# Altium PCB pale_sieve.PcbDoc (part 1 of 2)
Units mm, origin at the board's own origin, x right, y up, seen from the top; angles counter-clockwise.
Board outline 51 x 51 mm, 6 copper layers (Top, L2, L3, L4, L5, Bottom), stack 1.546 mm thick; 73 components, 40 nets, 184 pads, 29 vias.
Unrouted connection lines stored in the file: 36.
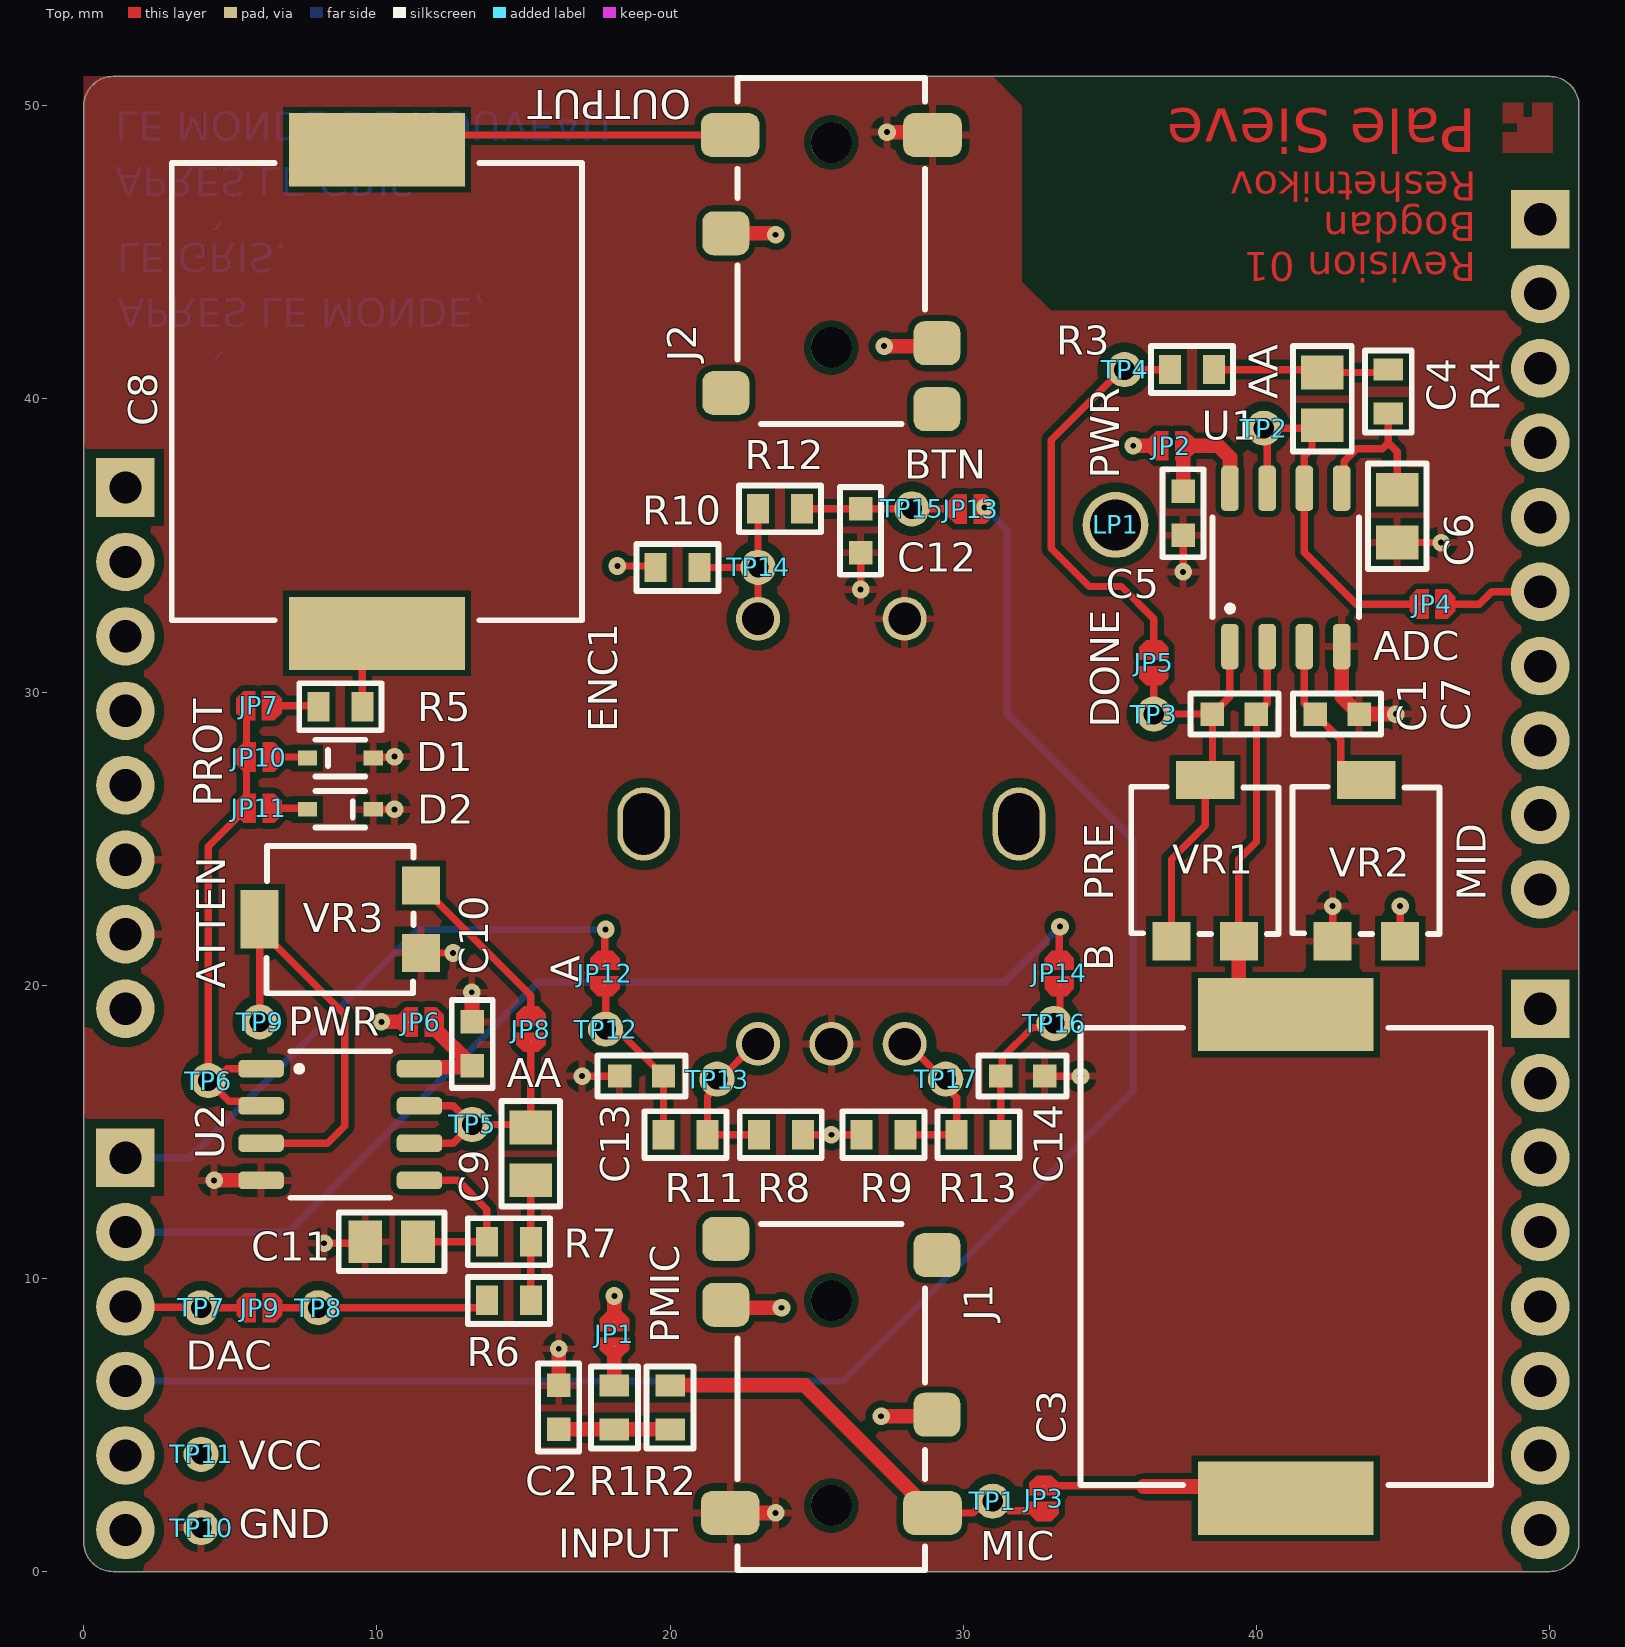
[diagram p0: Top view]
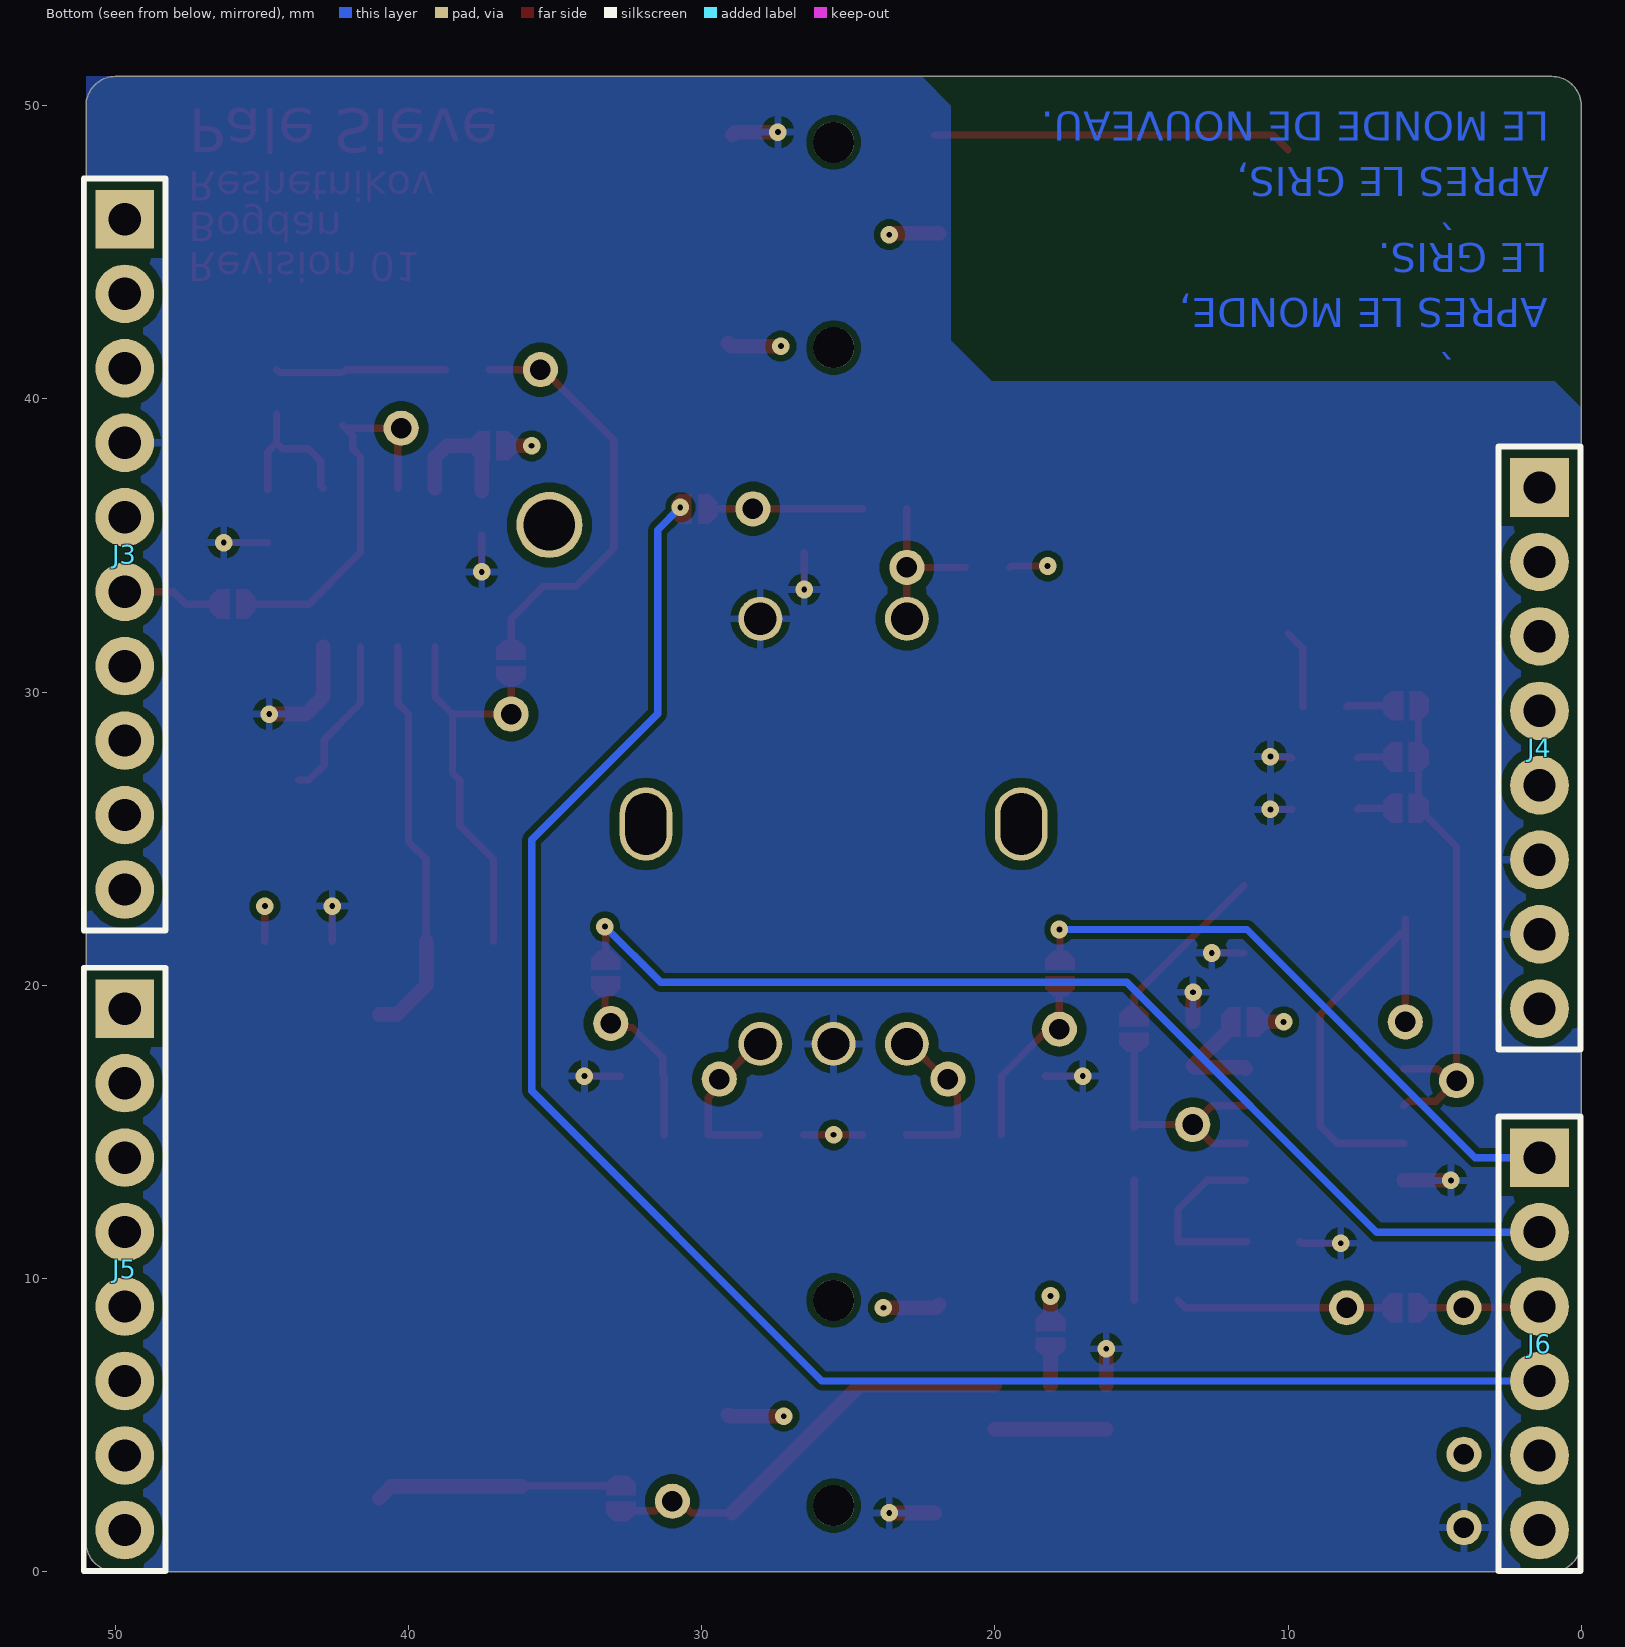
[diagram p1: Bottom view, seen from below]
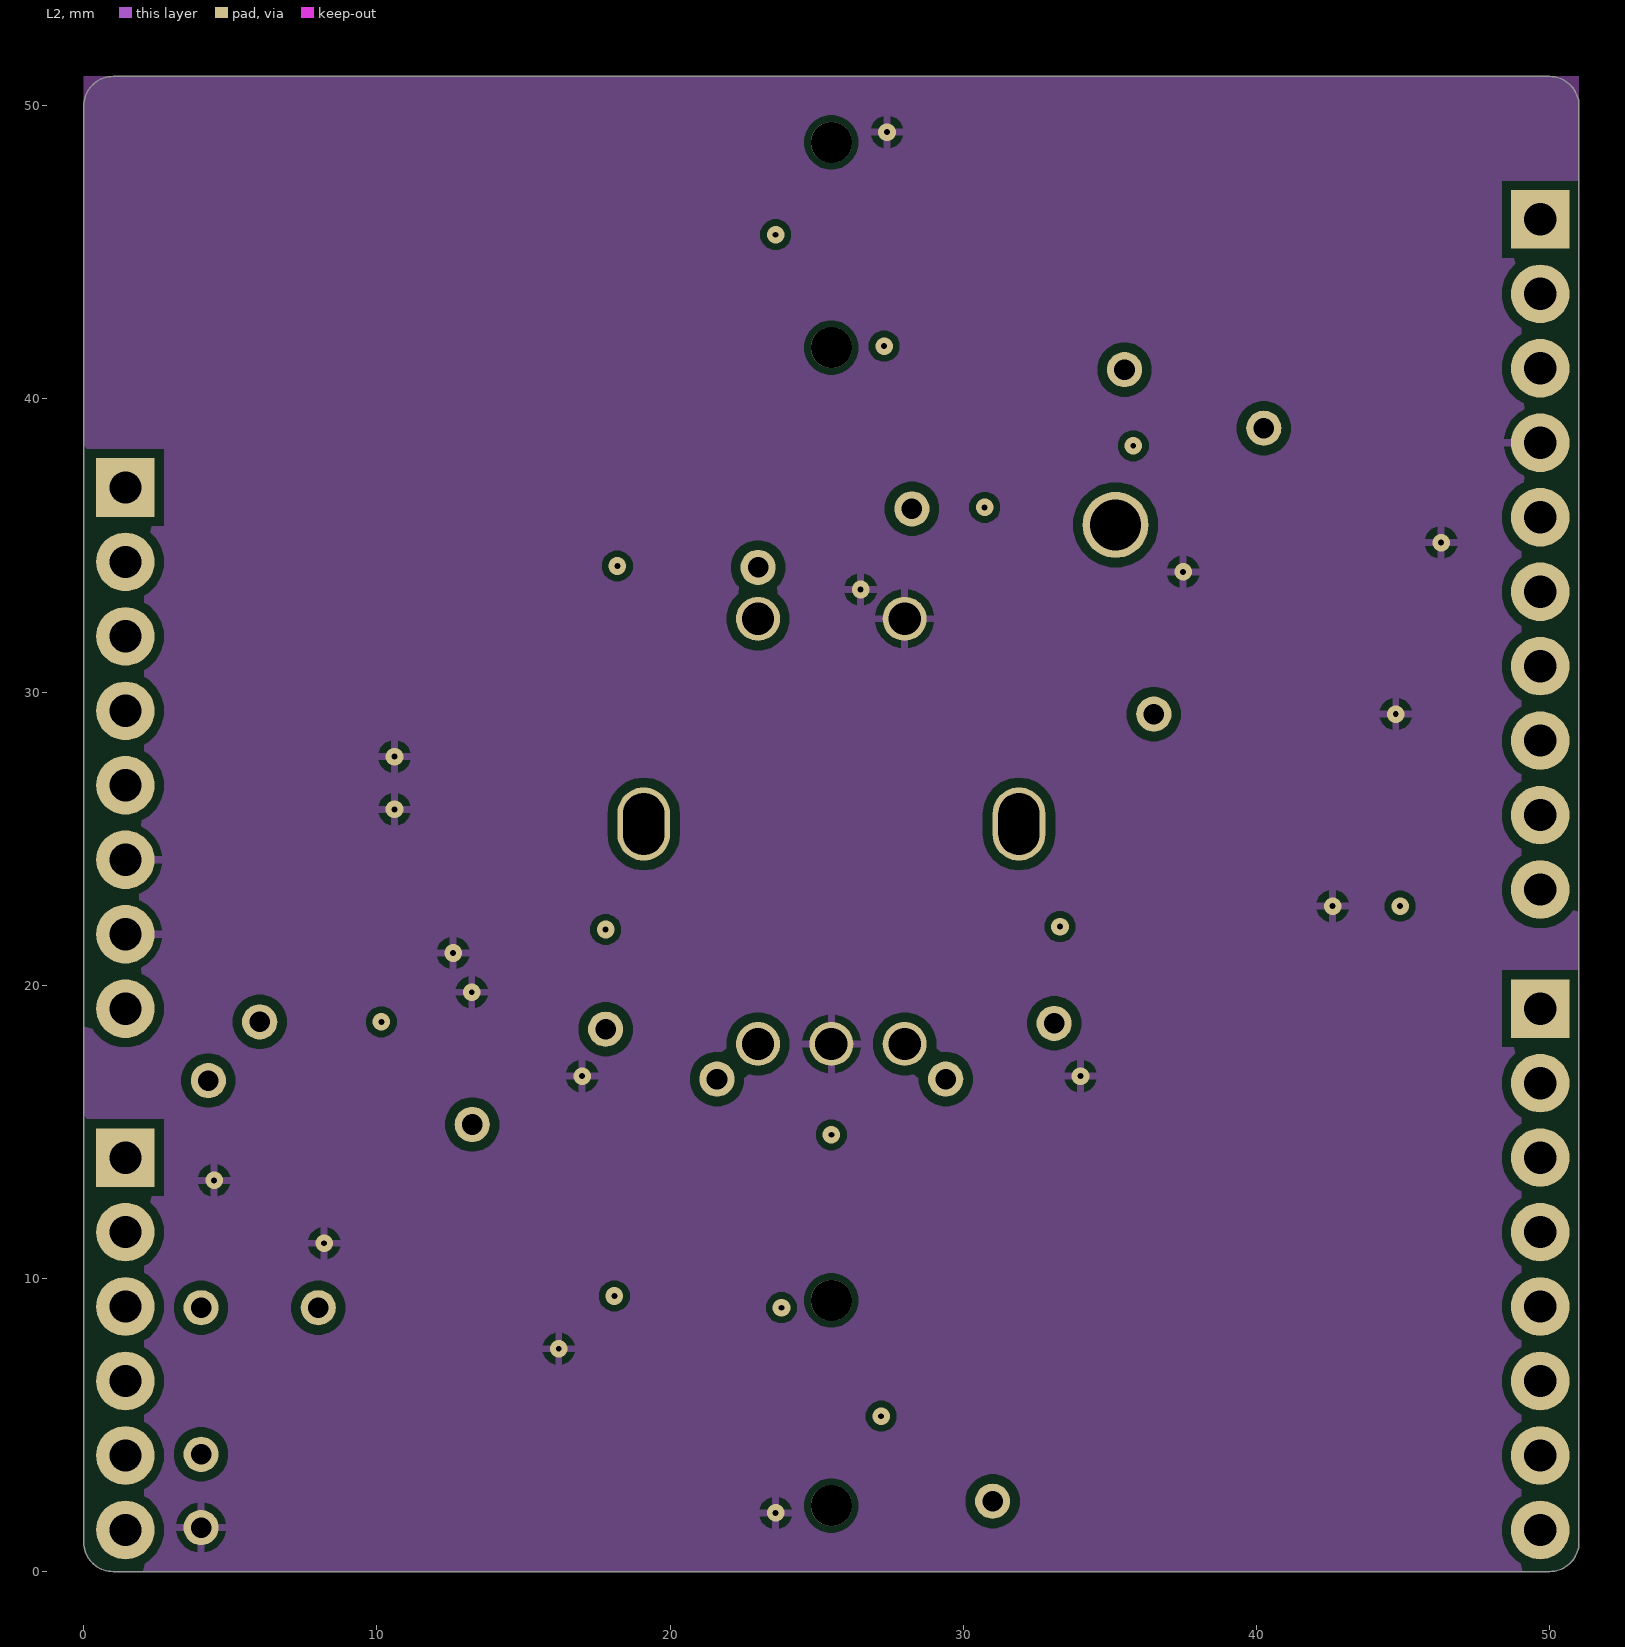
[diagram p2: L2]
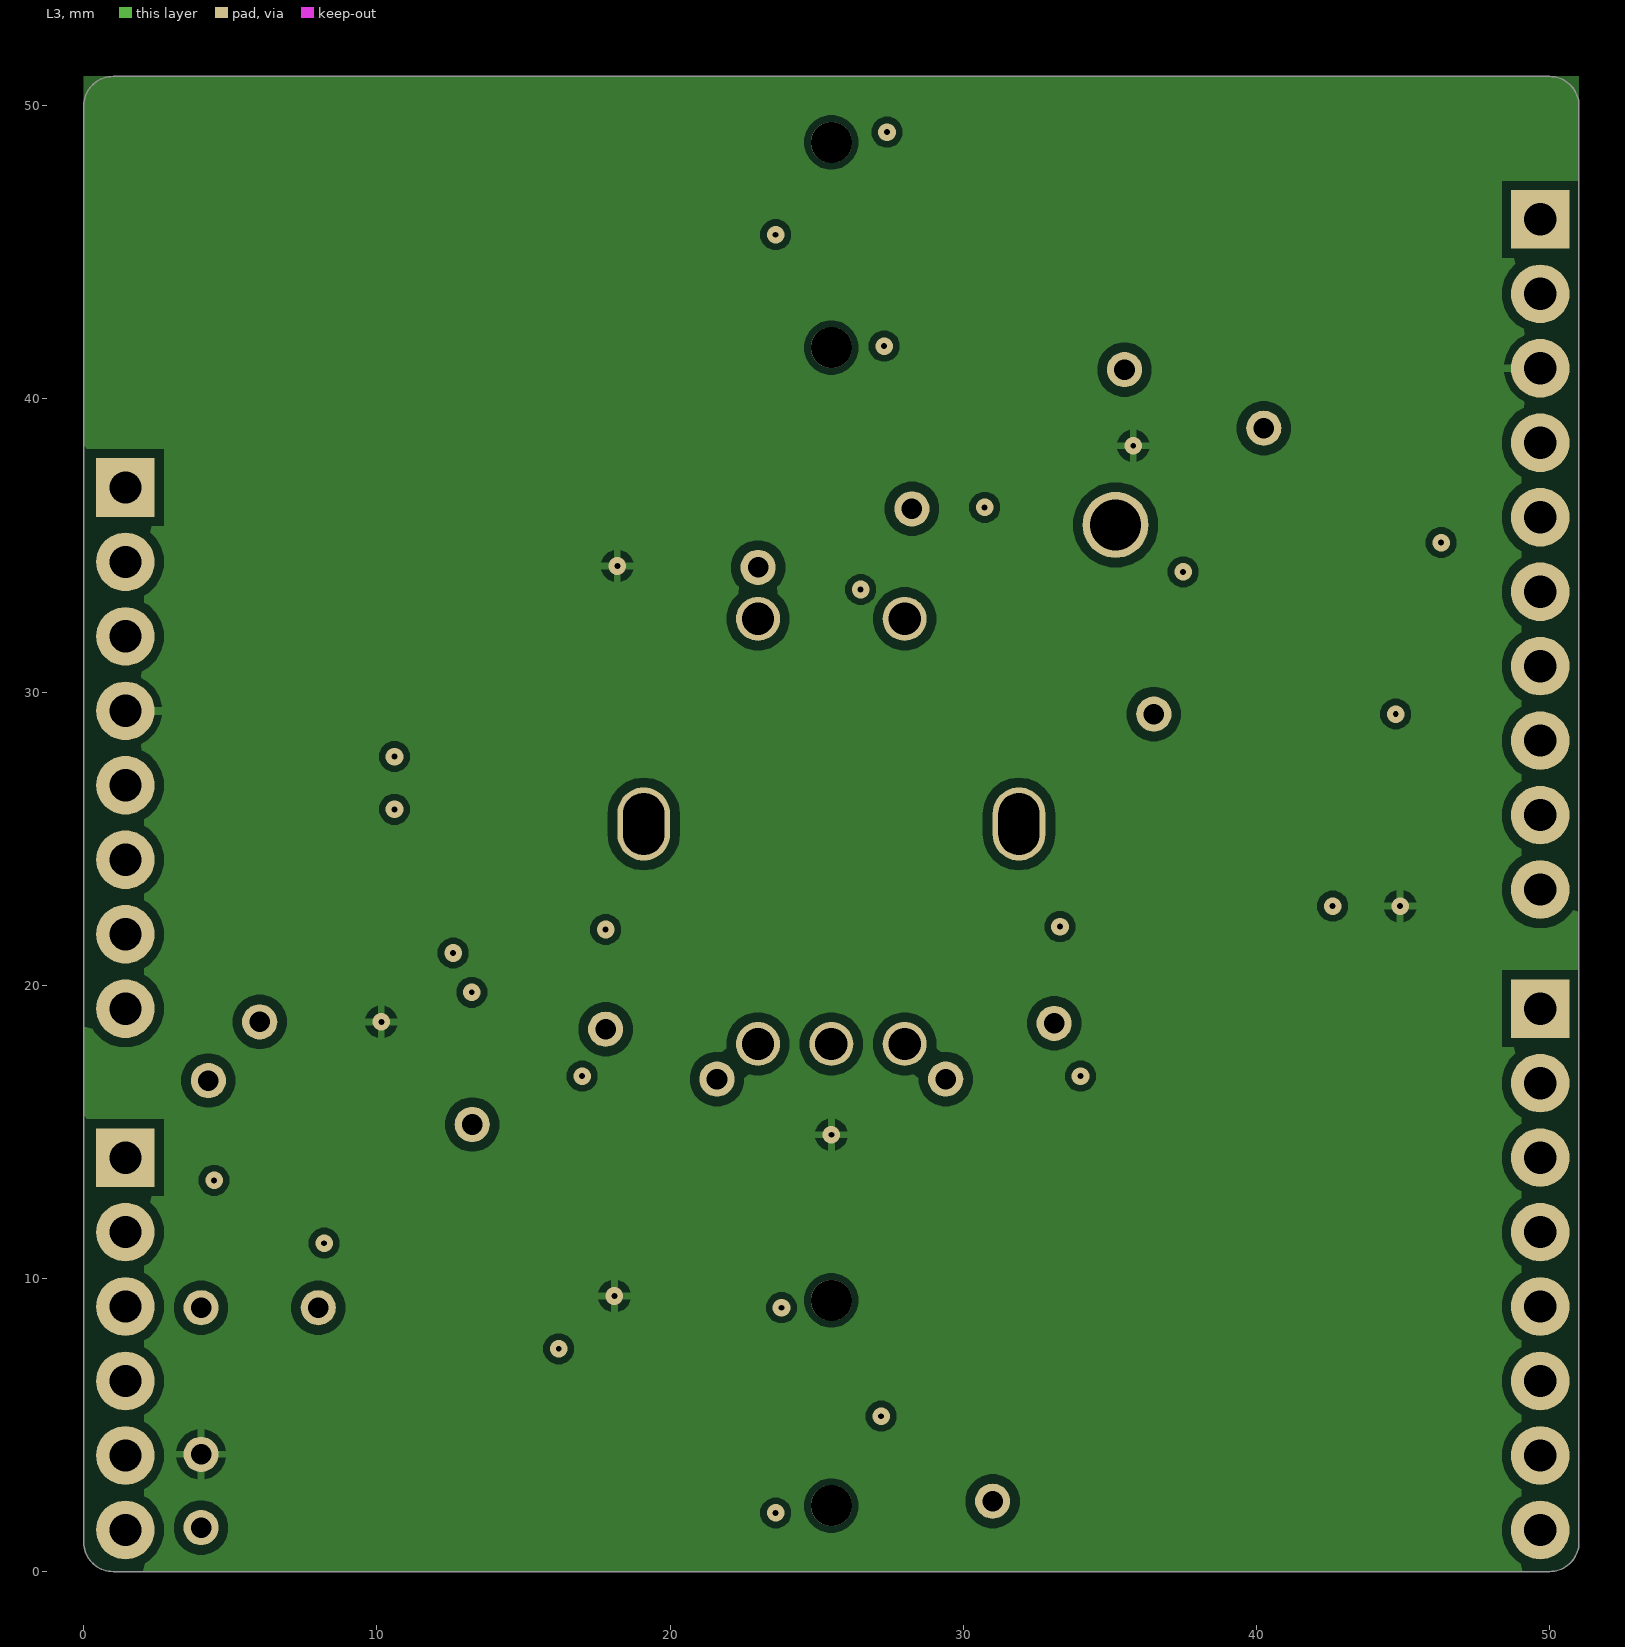
[diagram p3: L3]
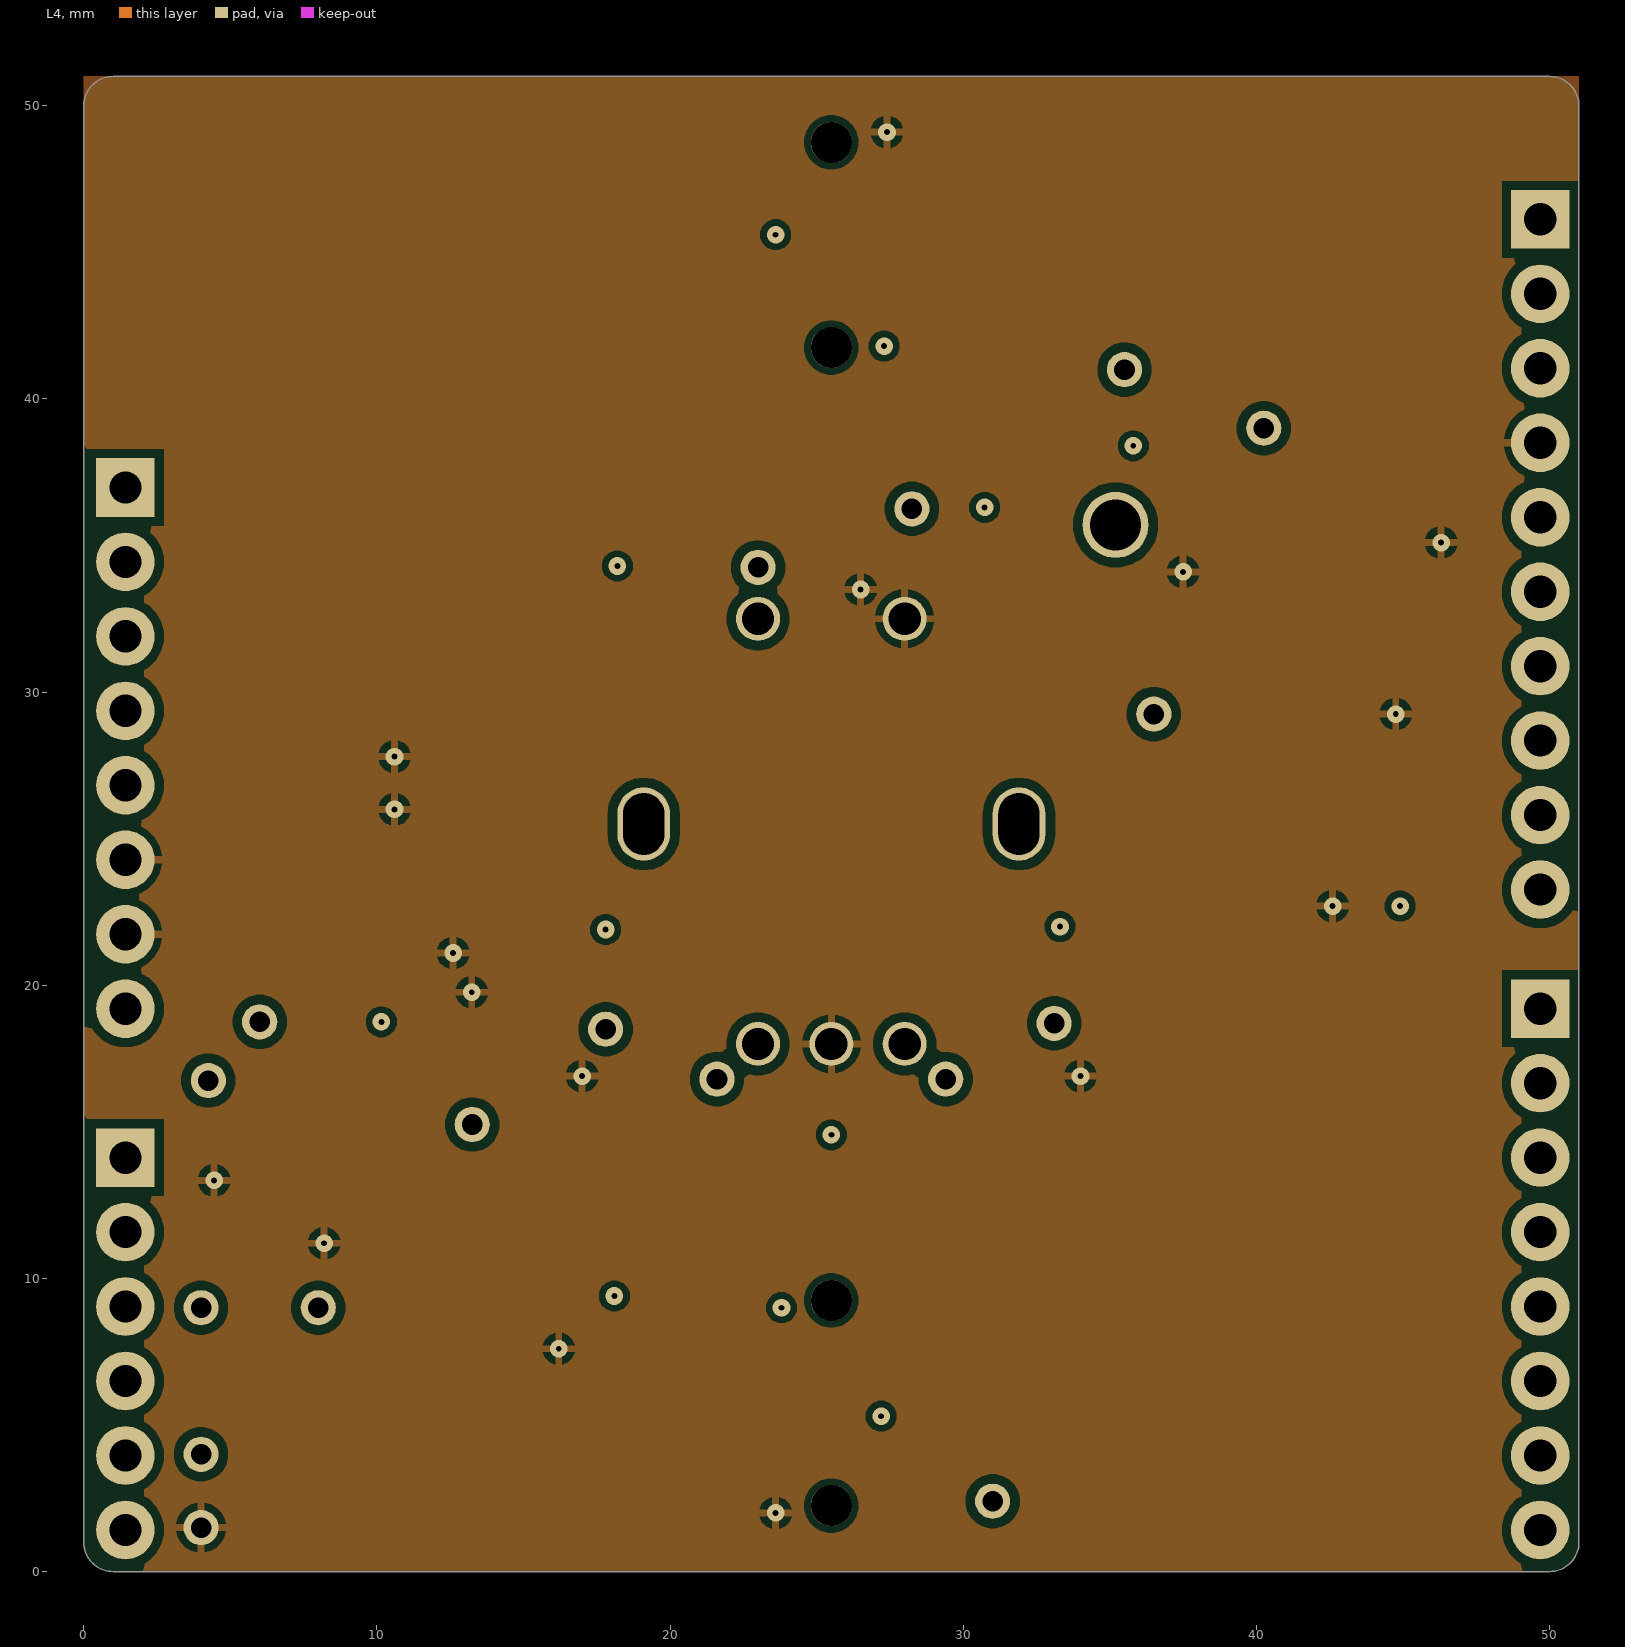
[diagram p4: L4]
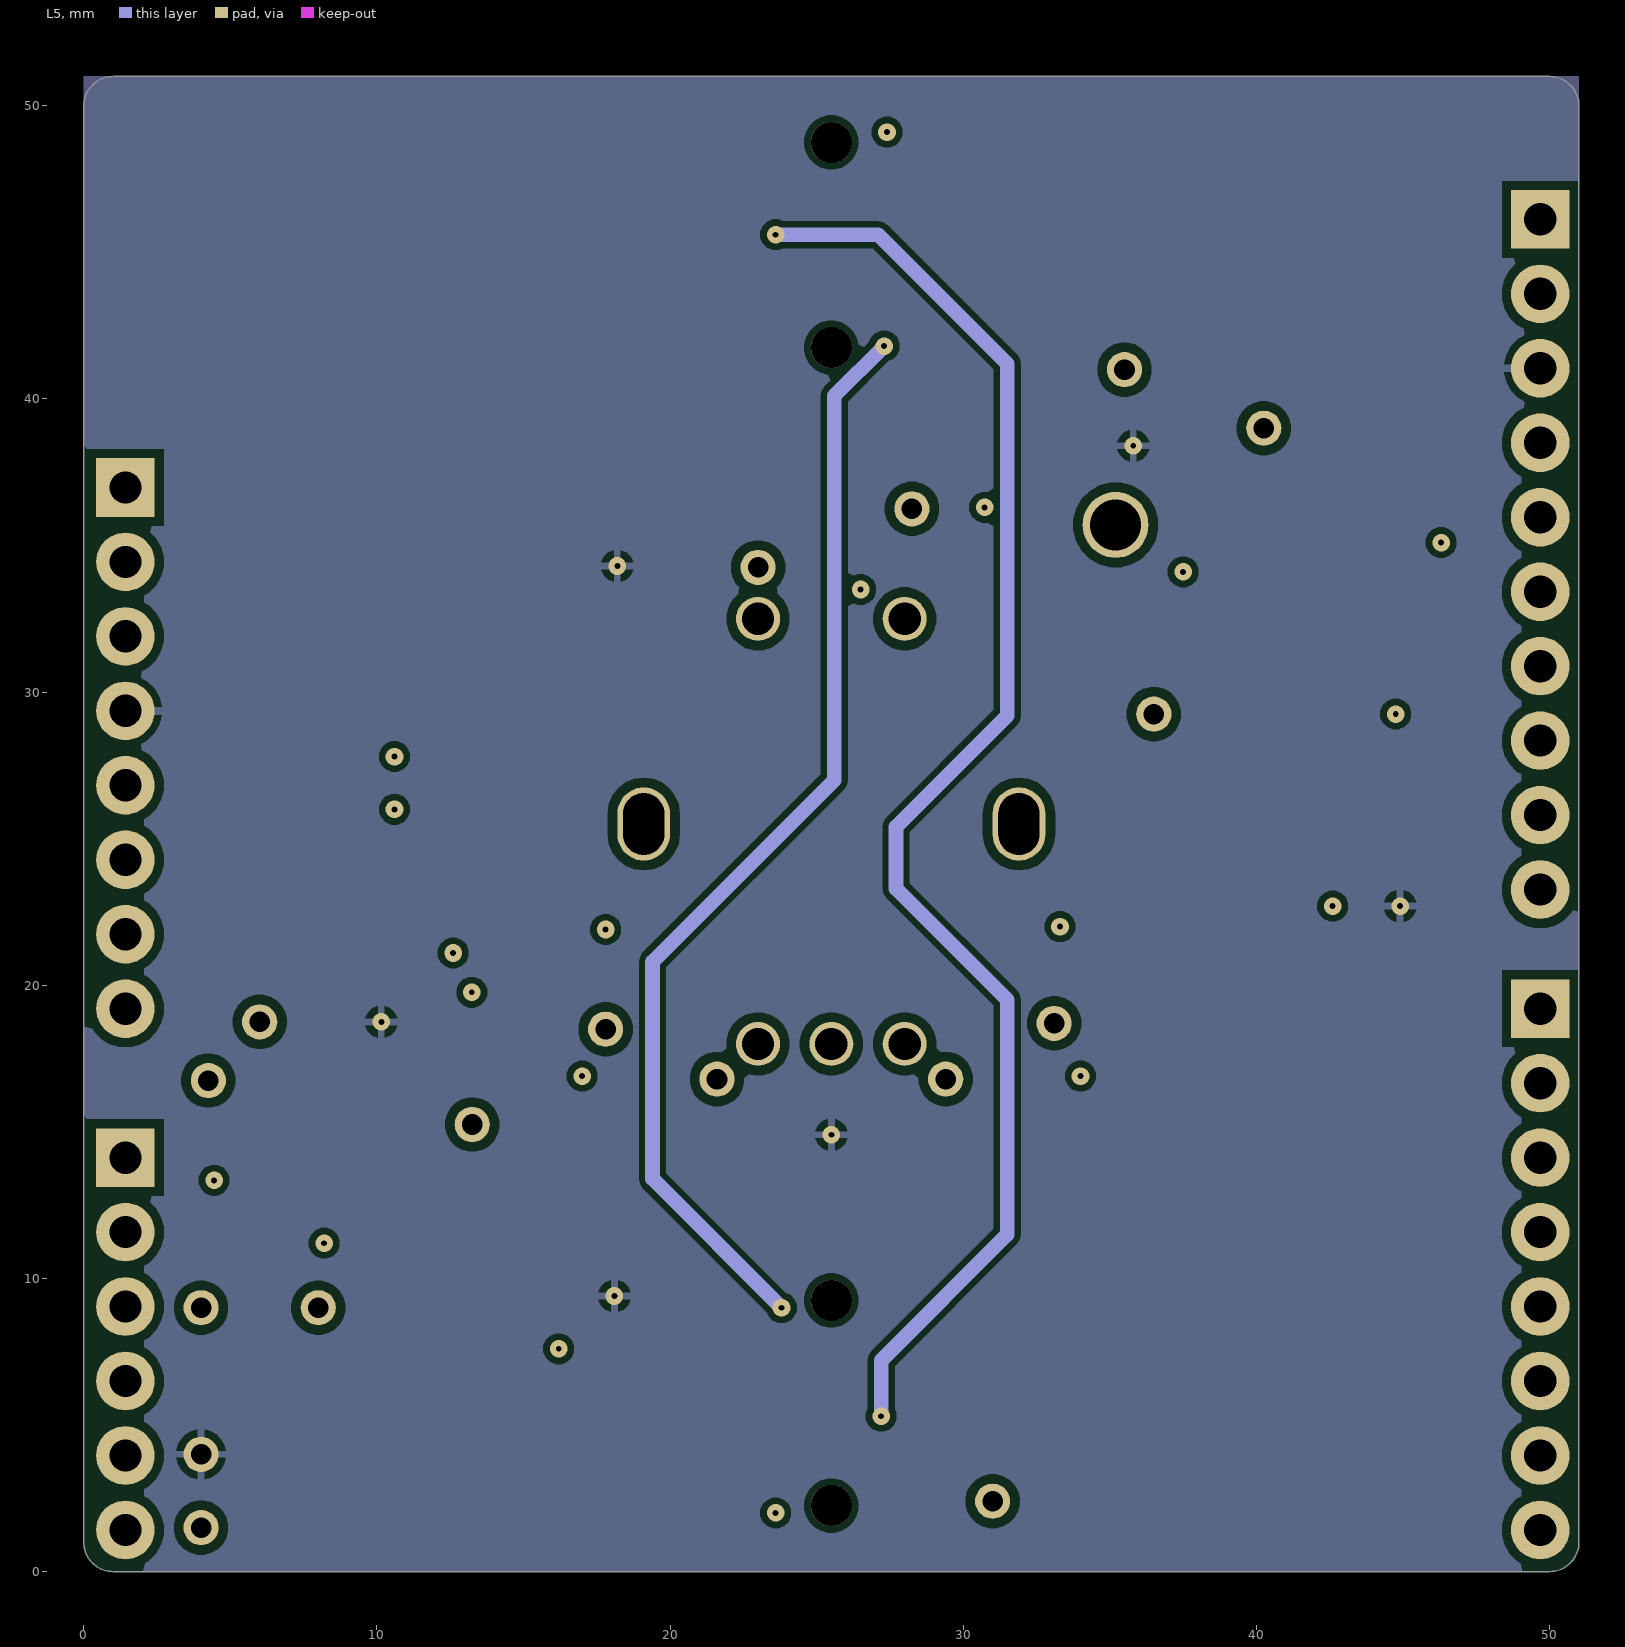
[diagram p5: L5]
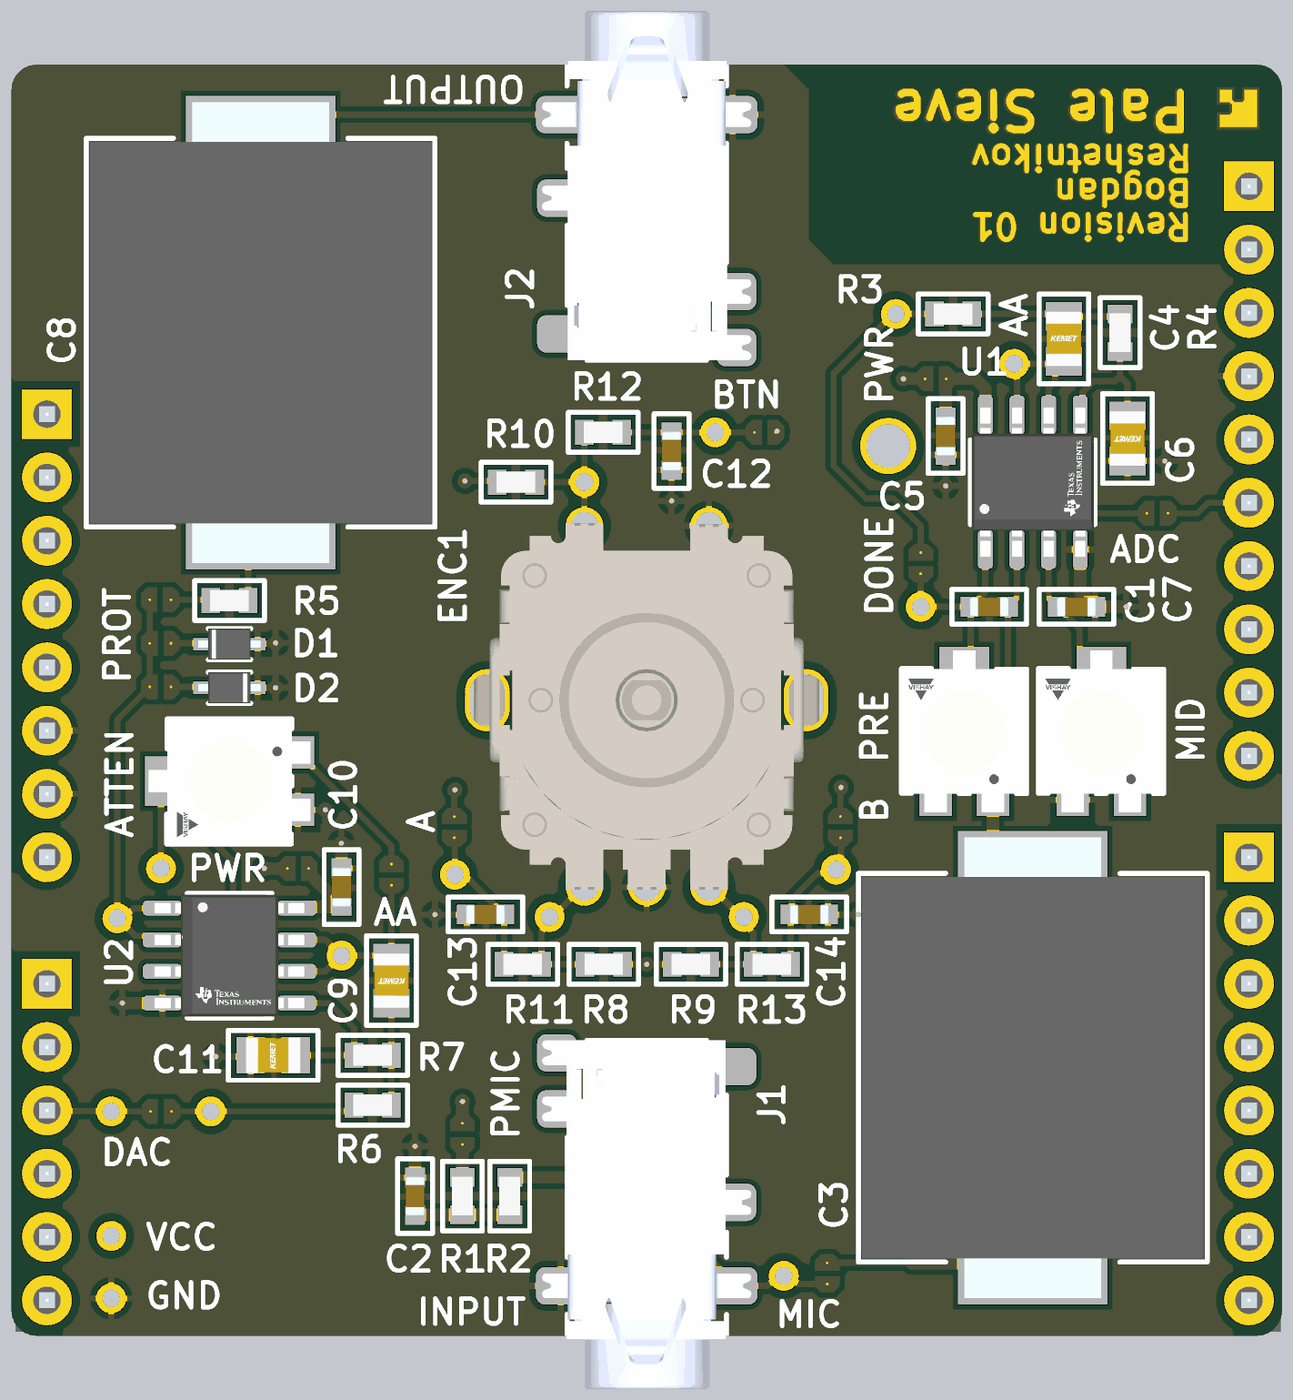
[diagram p6: 3D render of the assembled board from above, using the file's embedded part models]
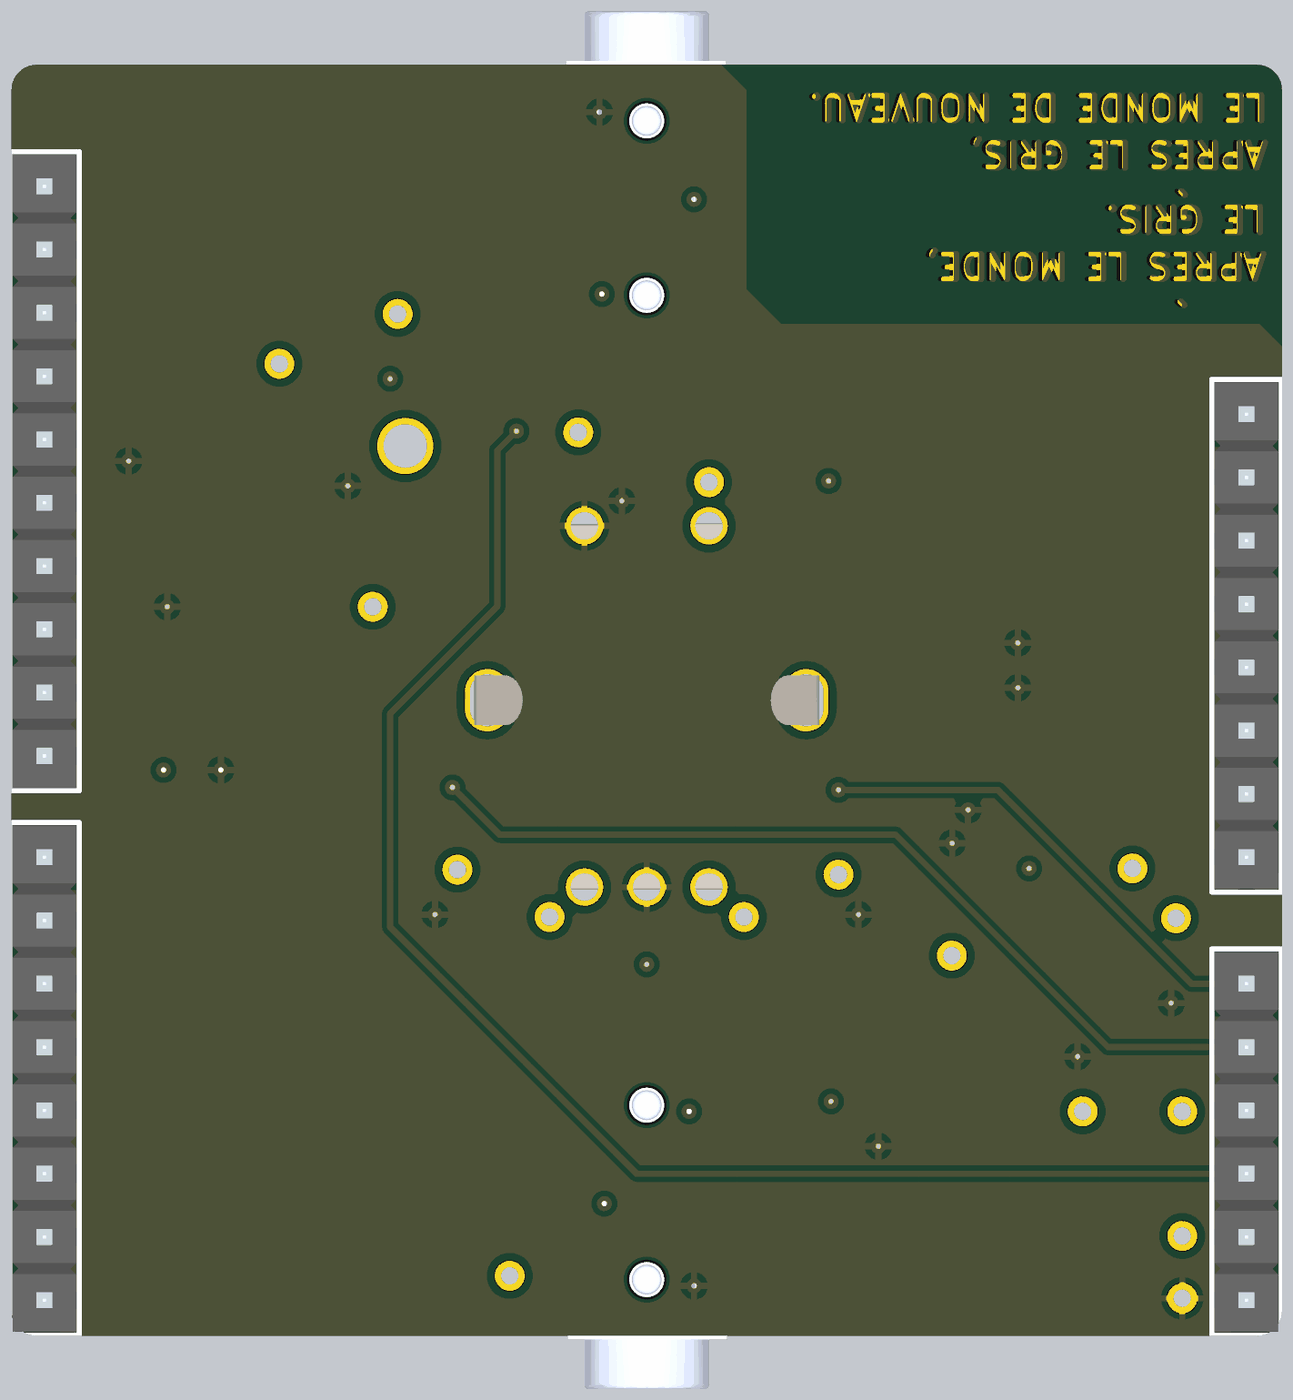
[diagram p7: 3D render of the assembled board from below, using the file's embedded part models]

## Layer stack, top to bottom
Top Solder: solder mask 0.0102, Solder Resist, Dk 3.5
Top: signal copper 0.035
Dielectric 4: prepreg 0.0994, 3313*1, Dk 4.1
L2: signal copper 0.0152
Dielectric 2: core 0.55, FR-4, Dk 4.1
L3: signal copper 0.0152
Dielectric 1: prepreg 0.1164, 2116*1, Dk 4.8
L4: signal copper 0.0152
Dielectric 3: core 0.55, FR-4, Dk 4.1
L5: signal copper 0.0152
Dielectric 5: prepreg 0.0994, 3313*1, Dk 4.1
Bottom: signal copper 0.035
Bottom Solder: solder mask 0.0102, Solder Resist, Dk 3.5

## Board outline
1,0 cw(c1,1) 0,1 0,50 cw(c1,50) 1,51 50,51 cw(c50,50) 51,50 51,1 cw(c50,1) 50,0

## Design rules (kind name [scope] priority, off if disabled: settings)
Clearance EdgeClearance [IsBoardOutline vs IsTrack] p1: gap=0.2 ignorepadtopadclearanceinfootprint=FALSE
Clearance NPTHCopperClearance [Hole and Not PadIsPlated] p2: gap=0.22 ignorepadtopadclearanceinfootprint=FALSE
Clearance PTHCopperClearance [PadIsPlated and Hole] p3: gap=0.32 ignorepadtopadclearanceinfootprint=FALSE
Clearance ViaHoleCopperClearance [IsVia vs Not IsVia] p4: gap=0.22 ignorepadtopadclearanceinfootprint=FALSE
Clearance [All] p5: gap=0.2 ignorepadtopadclearanceinfootprint=FALSE
ComponentClearance [All] p1: gap=0.25 collisioncheckmode=3 verticalgap=0.254 showdistances=FALSE
HoleSize [All] p1: absolutevalues=TRUE maxlimit=6.2 minlimit=0.16 maxpercent=80.000 minpercent=20.000
HoleToHoleClearance ViaHoleToHoleClearance [IsVia vs IsVia] p1: gap=0.21 allowstackedmicrovias=TRUE
HoleToHoleClearance [Not IsVia vs Not IsVia] p2: gap=0.46 allowstackedmicrovias=TRUE
MinimumAnnularRing [All] p1: minimumring=0.2
MinimumSolderMaskSliver [All] p1: minsoldermaskwidth=0.125
PolygonConnect [All] p1: connectstyle=Relief reliefconductorwidth=0.25 reliefentries=4 polygonreliefangle="90 Angle" airgapwidth=0.25
RoutingCorners [All] p1: cornerstyle=45-Degree minsetback=2.5 maxsetback=2.5
RoutingVias [All] p1: holewidth=0.3 width=0.5 viastyle="Through Hole" minholewidth=0.16 minwidth=0.26 maxholewidth=6.2 maxwidth=6.3
SilkToSolderMaskClearance [IsPad] p1: minsilkscreentomaskgap=0.16 clearancetoexposedcopper=TRUE
SolderMaskExpansion ViaSolderMaskExpansion [IsVia and (AsMM(HoleDiameter) <= 0.3)] p1: expansion=0.102 istentingtop=TRUE
SolderMaskExpansion HoleSolderMaskExpansion [Hole] p2: expansion=0.04 istentingtop=FALSE
SolderMaskExpansion [All] p3: expansion=0.04 istentingtop=FALSE
SupplyNets "Schematic Supply Nets_1" [InNet('GND')] p1: voltage=0.000
SupplyNets "Schematic Supply Nets" [InNet('VCC')] p2: voltage=0.000
UnRoutedNet [All] p1: checkbadconnections=TRUE
Width [All] p1: maxlimit=0.5 minlimit=0.1 preferedwidth=0.25
23 further rules are at their usual default settings.

## Components (designator, comment, footprint, x,y, rotation, side; value= is the part's Value field where it differs from the comment)
C1 "4p7 C0G" C0603 39.25,29.25 r180 top
C2 "10u X7T" C0603 16.2,5.6 r270 top
C3 "4u7 PET" "6054 WIMA" 41,10.75 r90 top value=4.7uF
C4 "47n C0G" C0805 42.25,40 r270 top
C5 "10u X7T" C0603 37.5,36.1 r90 top
C6 "47n C0G" C0805 44.8,36 r90 top
C7 "1u X5R" C0603 42.75,29.25 r180 top value=1uF
C8 "4u7 PET" "6054 WIMA" 10,40.25 r90 top value=4.7uF
C9 "47n C0G" C0805 15.25,14.25 r90 top
C10 "10u X7T" C0603 13.25,18 r270 top
C11 "47n C0G" C0805 10.5,11.25 r0 top
C12 "10n X7R" C0603 26.5,35.5 r90 top value=10nF
C13 "1n X8G" C0603 19.025,16.904 r0 top
C14 "1n X8G" C0603 32.025,16.904 r180 top
D1 "1N4148WS" SOD-323 8.75,27.75 r0 top
D2 "1N4148WS" SOD-323 8.75,26 r180 top
ENC1 "Quadrature Encoder" PEC11L 25.5,25.5 r0 top
J1 "TRRS 3.5mm" SJ2-35894B-SMT 25.5,2.25 r180 top
J2 "TRRS 3.5mm" SJ2-35894B-SMT 25.5,48.75 r0 top
J3 "10x2.54mm" "1X10 2.54MM" 49.68,46.124 r270 bottom locked
J4 "8x2.54mm" "1x8 2.54MM" 1.42,36.98 r270 bottom locked
J5 "8x2.54mm" "1x8 2.54MM" 49.68,19.2 r270 bottom locked
J6 "6x2.54mm" "1X6 2.54MM" 1.42,14.12 r270 bottom locked
JP1 "Normally open" "SB 1.0x1.5mm" 18.1,8.1 r90 top
JP2 "Normally open" "SB 1.0x1.5mm" 37.1,38.4 r180 top
JP3 "Normally open" "SB 1.0x1.5mm" 32.75,2.5 r90 top
JP4 "Normally open" "SB 1.0x1.5mm" 46,33 r0 top
JP5 "Normally open" "SB 1.0x1.5mm" 36.5,31 r90 top
JP6 "Normally open" "SB 1.0x1.5mm" 11.5,18.75 r180 top
JP7 "Normally open" "SB 1.0x1.5mm" 5.975,29.535 r0 top
JP8 "Normally open" "SB 1.0x1.5mm" 15.25,18.5 r90 top
JP9 "Normally open" "SB 1.0x1.5mm" 6,9 r0 top
JP10 "Normally open" "SB 1.0x1.5mm" 5.975,27.785 r180 top
JP11 "Normally open" "SB 1.0x1.5mm" 5.975,26.035 r180 top
JP12 "Normally open" "SB 1.0x1.5mm" 17.775,20.404 r270 top
JP13 "Normally open" "SB 1.0x1.5mm" 30.25,36.25 r0 top
JP14 "Normally open" "SB 1.0x1.5mm" 33.275,20.404 r270 top
LP1 "1.75mm Light Pipe" "PTH 1.75MM" 35.194,35.702 r0 top
R1 "1k" R0603 18.1,5.6 r90 top value=1kR
R2 "2k2" R0603 20,5.6 r270 top value=2.2kR
R3 "150R" R0603 37.8,41 r0 top
R4 "150R" R0603 44.5,40.25 r270 top
R5 "470R" R0603 8.75,29.5 r0 top
R6 "150R" R0603 14.5,9.25 r0 top
R7 "150R" R0603 14.5,11.25 r180 top
R8 "47k" R0603 23.775,14.904 r0 top value=47kR
R9 "47k" R0603 27.275,14.904 r180 top value=47kR
R10 "47k" R0603 20.25,34.25 r180 top value=47kR
R11 "1k" R0603 20.525,14.904 r0 top value=1kR
R12 "10k" R0603 23.75,36.25 r0 top value=10kR
R13 "1k" R0603 30.525,14.904 r180 top value=1kR
TP1 "PTH 0.75mm" "PTH 0.7MM" 31,2.4 r90 top
TP2 "PTH 0.75mm" "PTH 0.7MM" 40.25,39 r90 top
TP3 "PTH 0.75mm" "PTH 0.7MM" 36.5,29.25 r90 top
TP4 "PTH 0.75mm" "PTH 0.7MM" 35.5,41 r90 top
TP5 "PTH 0.75mm" "PTH 0.7MM" 13.25,15.25 r90 top
TP6 "PTH 0.75mm" "PTH 0.7MM" 4.25,16.75 r90 top
TP7 "PTH 0.75mm" "PTH 0.7MM" 4,9 r90 top
TP8 "PTH 0.75mm" "PTH 0.7MM" 8,9 r90 top
TP9 "PTH 0.75mm" "PTH 0.7MM" 6,18.75 r90 top
TP10 "PTH 0.75mm" "PTH 0.7MM" 4,1.5 r90 top
TP11 "PTH 0.75mm" "PTH 0.7MM" 4,4 r90 top
TP12 "PTH 0.75mm" "PTH 0.7MM" 17.8,18.5 r90 top
TP13 "PTH 0.75mm" "PTH 0.7MM" 21.6,16.8 r90 top
TP14 "PTH 0.75mm" "PTH 0.7MM" 23,34.25 r90 top
TP15 "PTH 0.75mm" "PTH 0.7MM" 28.25,36.25 r90 top
TP16 "PTH 0.75mm" "PTH 0.7MM" 33.1,18.7 r90 top
TP17 "PTH 0.75mm" "PTH 0.7MM" 29.4,16.8 r90 top
U1 "OPA2323" "SOIC-8 D" 41,34.25 r90 top
U2 "OPA2323" "SOIC-8 D" 8.75,15.25 r0 top
VR1 "1M" TS53YL 38.25,24.25 r0 top value=1MR
VR2 "200k" TS53YL 43.75,24.25 r0 top value=200kR
VR3 "1k" TS53YL 8.75,22.25 r90 top value=1kR

## Footprints (in the part's own frame and the unit in brackets; to place one, negate y for a bottom-side part, rotate by r counter-clockwise, add the part's x,y. Pads: shape width x height; smd on the part's side, far side on the other; paste and mask are expansions set on the pad)
"1X6 2.54MM" [mm]
  rect 2x2 hole 1.1: 1(0,0)
  round 2 hole 1.1: 2(2.54,0) 3(5.08,0) 4(7.62,0) 5(10.16,0) 6(12.7,0)
  silkscreen extent -1.4,-1.4 14.1,1.4, body extent -1.27,-1.27 13.97,1.27, height 8.69
"1x8 2.54MM" [mm]
  rect 2x2 hole 1.1: 1(0,0)
  round 2 hole 1.1: 2(2.54,0) 3(5.08,0) 4(7.62,0) 5(10.16,0) 6(12.7,0) 7(15.24,0) 8(17.78,0)
  silkscreen extent -1.4,-1.4 19.18,1.4, body extent -1.27,-1.27 19.05,1.27, height 8.54
"1X10 2.54MM" [mm]
  rect 2x2 hole 1.1: 1(0,0)
  round 2 hole 1.1: 2(2.54,0) 3(5.08,0) 4(7.62,0) 5(10.16,0) 6(12.7,0) 7(15.24,0) 8(17.78,0) 9(20.32,0) 10(22.86,0)
  silkscreen extent -1.4,-1.4 24.26,1.4, body extent -1.27,-1.27 24.13,1.27, height 8.54
"6054 WIMA" [mm]
  rect 2.5x6 smd: 1(-8.25,0) 2(8.25,0)
  silkscreen extent -7.8,-7 7.8,7, body extent -9.25,-6.85 9.25,6.85, height 7.4
C0603 [mm]
  rect 0.8x0.8 smd: 1(-0.75,0) 2(0.75,0)
  silkscreen extent -1.5,-0.7 1.5,0.7, body extent -0.8,-0.4 0.8,0.4, height 0.9
C0805 [mm]
  rect 1.15x1.45 smd: 1(-0.9,0) 2(0.9,0)
  silkscreen extent -1.8,-1 1.8,1, body extent -1.1,-0.72 1.1,0.72, height 1.4
PEC11L [mm]
  round 1.5 hole 1.1: 1(-2.5,7) 2(2.5,7) 3(-2.5,-7.5) 4(2.5,-7.5) 5(0,-7.5)
  oval 1.8x2.5 hole 1.4 slot 2.1 at 90 deg: 6(-6.4,0) 7(6.4,0)
  body extent -6.92,-7.6 6.92,7.1, height 24.6
"PTH 0.7MM" [mm]
  round 1.2 hole 0.7: 1(0,0)
"PTH 1.75MM" [mm]
  round 2.25 hole 1.75: 1(0,0)
  body extent -0.87,-0.92 0.87,0.82, height 1
R0603 [mm]
  rect 0.75x1 smd: 1(-0.75,0) 2(0.75,0)
  silkscreen extent -1.4,-0.8 1.4,0.8, body extent -0.77,-0.43 0.77,0.43, height 0.45
"SB 1.0x1.5mm" [mil]
  round 1 smd: 1(-16.73,0) 2(16.73,0)
  Top region: 3.94,-19.68 20.67,-19.68 30.51,-9.84 30.51,9.84 20.67,19.68 3.94,19.68
  Top region: -4.92,19.69 -20.67,19.69 -30.51,9.84 -30.51,-9.84 -20.67,-19.68 -4.92,-19.68
SJ2-35894B-SMT [mm]
  rrect50% 2x1.5 smd: 1(-3.45,0.25) 4(3.45,0.25)
  rrect50% 1.6x1.5 smd: 2(3.6,-6.85) 3(-3.6,-3.1) 10(3.6,-9.1) 11(-3.6,-8.55)
  round 1.4 hole 1.4 unplated mask+0.102: 12(0,0) 12(0,-7)
  silkscreen extent -3.2,-9.6 3.2,2.2, body extent -4.2,-9.6 4.2,4.4, height 4.75
SOD-323 [mm]
  rect 0.65x0.5 smd: 1(-1.125,0) 2(1.125,0)
  silkscreen extent -0.85,-0.63 0.85,0.63, body extent -1.25,-0.63 1.25,0.63, height 0.9
"SOIC-8 D" [mm]
  rrect50% 1.55x0.6 smd: 1(-2.7,1.905) 2(-2.7,0.635) 3(-2.7,-0.635) 4(-2.7,-1.905) 5(2.7,-1.905) 6(2.7,-0.635) 7(2.7,0.635) 8(2.7,1.905)
  silkscreen extent -1.7,-2.5 1.7,2.5, body extent -3,-2.45 3,2.45, height 1.75
TS53YL [mm]
  rect 1.3x1.3 smd: 1(-1.15,-2.75) 3(1.15,-2.75)
  rect 2x1.3 smd: 2(0,2.75)
  silkscreen extent -2.52,-2.5 2.5,2.52, body extent -2.5,-3.25 2.5,3.25, height 2.6

## Part data
C1: library part 06035U4R7JAT2A, "Multilayer Ceramic Capacitors MLCC - SMD/SMT 50V 4.7pF C0G 0603 5% Tol Ultra Low ESR", Manufacturer="Kyocera AVX", Supplier Part Number=581-06035U4R7JAT2A, Category="Ceramic Capacitors", ComponentLink1Description=https://datasheet.ciiva.com/11551/useries-11551734.pdf?src-supplier=Avnet, ComponentLink1URL=https://datasheet.ciiva.com/11551/useries-11551734.pdf?src-supplier=Avnet, ComponentLink2Description=https://datasheet.ciiva.com/6265/useries-6265127.pdf?src-supplier=Digikey, ComponentLink2URL=https://datasheet.ciiva.com/6265/useries-6265127.pdf?src-supplier=Digikey, Manufacturer Part Number=06035U4R7JAT2A, Pricing="1=0.39, 10=0.256, 50=0.256, 100=0.16, 1000=0.121, 10000=0.092 (USD)", RoHS=Yes, Stock=33815, Supplier=Mouser
C2 C5 C10: library part CGA3EDX7T1A106M080AU, Manufacturer=TDK, Supplier Part Number=810-CGA3EDX7T1A106M0, Category="Ceramic Capacitors", Manufacturer Part Number=CGA3EDX7T1A106M080AU, Pricing="1=0.49, 10=0.321, 50=0.321, 100=0.193, 1000=0.149, 10000=0.112 (USD)", RoHS=No, Stock=910, Supplier=Mouser
C3 C8: library part SMDTD04470YA00KS00, "Film Capacitor, Polyethylene Terephthalate, 100V, 10% +Tol, 10% -Tol, 4.7uF, Surface Mount, 6054", Capacitor Type=FILM, Case/Package=6054, Dielectric Material=Polyethylene, Manufacturer=WIMA, Max Operating Temperature=100°C, Min Operating Temperature=-55°C, Package Style=SMTMeter, Rated AC Voltage (URac)=63V, Rated DC Voltage (URdc)=100V, Supplier Part Number=505-SMDTD04470YA00KS, Tolerance  (fill in as +-)=10%, Category="Film Capacitors", ComponentLink1Description=https://datasheet.ciiva.com:443/pdfs/VipMasterIC/IC/WIMA/WIMA-S-A0007419195/WIMA-S-A0007419195-1.pdf?src-supplier=IHS+Markit, ComponentLink1URL=https://datasheet.ciiva.com:443/pdfs/VipMasterIC/IC/WIMA/WIMA-S-A0007419195/WIMA-S-A0007419195-1.pdf?src-supplier=IHS+Markit, ComponentLink2Description=https://datasheet.ciiva.com/8034/1674204-8034651.pdf?src-supplier=Element14, ComponentLink2URL=https://datasheet.ciiva.com/8034/1674204-8034651.pdf?src-supplier=Element14, Height=7mm, JESD-609 Code=e3, Length=15.3mm, Manufacturer Part Number=SMDTD04470YA00KS00, Packaging=Bulk, Pins=2, Pricing="1=2.93, 10=2.13, 50=1.96, 100=1.64, 1000=1.31, 10000=1.18 (USD)", Reach SVHC Compliant=Yes, RoHS=Yes, RoHS Compliant=Yes, Stock=606, Supplier=Mouser, Terminal Finish=Tin, Tolerance (fill in as +-)=10%, Width=13.7mm
C4 C6 C9 C11: library part C0805C473G3GECAUTO, "Ceramic Capacitor, Multilayer, Ceramic, 25V, 2% +Tol, 2% -Tol, C0G, -/+30ppm/Cel TC, 0.047uF, Surface Mount, 0805", Capacitor Type=Ceramic, Manufacturer=KEMET, Supplier Part Number=80-C0805C473G3GECAUT, Category="Ceramic Capacitors", ComponentLink1Description=https://datasheet.ciiva.com:443/pdfs/VipMasterIC/IC/KEME/KEME-S-A0008958440/KEME-S-A0008958440-1.pdf?src-supplier=IHS+Markit, ComponentLink1URL=https://datasheet.ciiva.com:443/pdfs/VipMasterIC/IC/KEME/KEME-S-A0008958440/KEME-S-A0008958440-1.pdf?src-supplier=IHS+Markit, ComponentLink2Description=https://api.kemet.com/component-edge/download/datasheet/C0805C473G3GECAUTO.pdf?src-supplier=Digikey, ComponentLink2URL=https://api.kemet.com/component-edge/download/datasheet/C0805C473G3GECAUTO.pdf?src-supplier=Digikey, Dielectric Material=Ceramic, Manufacturer Part Number=C0805C473G3GECAUTO, Pins=2, Pricing="1=0.86, 10=0.61, 50=0.61, 100=0.482, 1000=0.399, 10000=0.329 (USD)", Reach SVHC Compliant=Yes, RoHS=Yes, RoHS Compliant=Yes, Stock=3931, Supplier=Mouser
C7: library part 0603YD105KAT2A, "Ceramic Capacitor, Multilayer, Ceramic, 16V, 10% +Tol, 10% -Tol, X5R, 15% TC, 1uF, Surface Mount, 0603", Capacitor Type=Ceramic, Case/Package=0603, Manufacturer="Kyocera AVX", Max Operating Temperature=85°C, Min Operating Temperature=-55°C, Package Shape=Rectangular, Package Style=SMTMeter, Rated DC Voltage (URdc)=16V, Supplier Part Number=581-0603YD105K, Temperature Characteristics Code=X5R, Tolerance  (fill in as +-)=10%, Category="Ceramic Capacitors", ComponentLink1Description=https://datasheet.ciiva.com:443/pdfs/VipMasterIC/IC/AVXC/AVXC-S-A0009640604/AVXC-S-A0009640604-1.pdf?src-supplier=IHS+Markit, ComponentLink1URL=https://datasheet.ciiva.com:443/pdfs/VipMasterIC/IC/AVXC/AVXC-S-A0009640604/AVXC-S-A0009640604-1.pdf?src-supplier=IHS+Markit, ComponentLink2Description=https://datasheet.ciiva.com/34303/2012654-34303835.pdf?src-supplier=Jameco, ComponentLink2URL=https://datasheet.ciiva.com/34303/2012654-34303835.pdf?src-supplier=Jameco, ComponentLink3Description=https://datasheet.ciiva.com/11788/0900766b80def1a5-11788563.pdf?src-supplier=Rs, ComponentLink3URL=https://datasheet.ciiva.com/11788/0900766b80def1a5-11788563.pdf?src-supplier=Rs, ComponentLink4Description=https://datasheet.ciiva.com/150/cx5r-150393.pdf?src-supplier=Digikey, ComponentLink4URL=https://datasheet.ciiva.com/150/cx5r-150393.pdf?src-supplier=Digikey, ComponentLink5Description=https://datasheet.ciiva.com/5412/cx5r-5412550.pdf?src-supplier=Mouser, ComponentLink5URL=https://datasheet.ciiva.com/5412/cx5r-5412550.pdf?src-supplier=Mouser, ComponentLink6Description=https://datasheet.ciiva.com/14586/70001028-14586715.pdf?src-supplier=Allied+Electronics, ComponentLink6URL=https://datasheet.ciiva.com/14586/70001028-14586715.pdf?src-supplier=Allied+Electronics, ComponentLink7Description=https://datasheet.ciiva.com/14590/70001028-14590632.pdf?src-supplier=Allied+Electronics, ComponentLink7URL=https://datasheet.ciiva.com/14590/70001028-14590632.pdf?src-supplier=Allied+Electronics, ComponentLink8Description=https://datasheet.ciiva.com/2987/cx5r-2987890.pdf?src-supplier=Avnet, ComponentLink8URL=https://datasheet.ciiva.com/2987/cx5r-2987890.pdf?src-supplier=Avnet, ComponentLink9Description=https://datasheet.ciiva.com/1458/84508-1458137.pdf?src-supplier=Element14, ComponentLink9URL=https://datasheet.ciiva.com/1458/84508-1458137.pdf?src-supplier=Element14, ComponentLink10Description=https://datasheet.ciiva.com/1458/84508-1458138.pdf?src-supplier=Element14, ComponentLink10URL=https://datasheet.ciiva.com/1458/84508-1458138.pdf?src-supplier=Element14, ComponentLink11Description=https://datasheet.ciiva.com/150/cx5r-150392.pdf?src-supplier=Digikey, ComponentLink11URL=https://datasheet.ciiva.com/150/cx5r-150392.pdf?src-supplier=Digikey, ComponentLink12Description=https://datasheet.ciiva.com/150/cx5r-150394.pdf?src-supplier=Digikey, ComponentLink12URL=https://datasheet.ciiva.com/150/cx5r-150394.pdf?src-supplier=Digikey, Dielectric Material=Ceramic, Height=0.9mm, JESD-609 Code=e3, Length=1.6mm, Manufacturer Part Number=0603YD105KAT2A, Mounting Technology="Surface Mount", Multilayer=Yes, Packaging="Tape and Reel", Pins=2, Pricing="1=0.1, 10=0.054, 50=0.054, 100=0.039, 1000=0.028, 10000=0.014 (USD)", Reach SVHC Compliant=Yes, RoHS=Yes, RoHS Compliant=Yes, Stock=78861, Supplier=Mouser, Terminal Finish=Nickel, Termination=Wraparound, Tolerance (fill in as +-)=10%, Width=0.81mm
C12: library part GCM188R71H103KA37J, "Ceramic Capacitor, Multilayer, Ceramic, 50V, 10% +Tol, 10% -Tol, X7R, 15% TC, 0.01uF, Surface Mount, 0603", Capacitor Type=Ceramic, Case/Package=0603, Manufacturer=Murata, Max Operating Temperature=125°C, Min Operating Temperature=-55°C, Package Shape=Rectangular, Package Style=SMTMeter, Rated DC Voltage (URdc)=50V, Supplier Part Number=81-GCM188R71H103KA7J, Temperature Characteristics Code=X7R, Tolerance  (fill in as +-)=10%, Category="Ceramic Capacitors", ComponentLink1Description=https://datasheet.ciiva.com:443/pdfs/VipMasterIC/IC/MURE/MURE-S-A0004362469/MURE-S-A0004362747-1.pdf?src-supplier=IHS+Markit, ComponentLink1URL=https://datasheet.ciiva.com:443/pdfs/VipMasterIC/IC/MURE/MURE-S-A0004362469/MURE-S-A0004362747-1.pdf?src-supplier=IHS+Markit, ComponentLink2Description=http://components.arrow.com/part/dataview/46582708S9924635N2606?src-supplier=Arrow+Electronics, ComponentLink2URL=http://components.arrow.com/part/dataview/46582708S9924635N2606?src-supplier=Arrow+Electronics, ComponentLink3Description=http://www.mouser.com/ds/2/281/c03e-806517.pdf?src-supplier=Mouser, ComponentLink3URL=http://www.mouser.com/ds/2/281/c03e-806517.pdf?src-supplier=Mouser, ComponentLink4Description=https://psearch.en.murata.com/capacitor/product/GCM188R71H103KA37%23.pdf?src-supplier=Digikey, ComponentLink4URL=https://psearch.en.murata.com/capacitor/product/GCM188R71H103KA37%23.pdf?src-supplier=Digikey, ComponentLink5Description=https://datasheet.octopart.com/GCM188R71H103KA37J-Murata-datasheet-41571772.pdf?src-supplier=Future+Electronics, ComponentLink5URL=https://datasheet.octopart.com/GCM188R71H103KA37J-Murata-datasheet-41571772.pdf?src-supplier=Future+Electronics, Dielectric Material=Ceramic, Height=0.9mm, JESD-609 Code=e3, Length=1.6mm, Manufacturer Part Number=GCM188R71H103KA37J, Mounting Technology="Surface Mount", Multilayer=Yes, Packaging="Tape and Reel", Pins=2, Pricing="1=0.12, 10=0.07, 50=0.07, 100=0.043, 1000=0.03, 10000=0.019 (USD)", Reach SVHC Compliant=Yes, Reference Standard=AEC-Q200, RoHS=Yes, RoHS Compliant=Yes, Stock=4285681, Supplier=Mouser, Terminal Finish=Nickel, Termination=Wraparound, Tolerance (fill in as +-)=10%, Width=0.8mm
C13 C14: library part C0603C102J2TACAUTO, Manufacturer=KEMET, Supplier Part Number=80-C0603C102J2TAUTO, Manufacturer Part Number=C0603C102J2TACAUTO, Pricing="1=0.55, 10=0.357, 50=0.357, 100=0.252, 1000=0.197, 10000=0.149 (USD)", RoHS=No, Stock=6659, Supplier=Mouser
D1 D2: "Rectifier Diode, 1 Phase, 1 Element, 0.15A, 100V V(RRM), Silicon", Forward Voltage=1V, Manufacturer="ON Semiconductor / Fairchild", Max Operating Temperature=150°C, Max Output current=150mA, Package Body Material=Plastic, Package Shape=Rectangular, Package Style="SMALL OUTLINEMeter", Rep Pk Reverse Voltage-Max=100V, Supplier Part Number=512-1N4148WS, Category="Rectifier Diodes", ComponentLink1Description=https://datasheet.ciiva.com:443/pdfs/VipMasterIC/IC/ONSM/ONSM-S-A0003392874/ONSM-S-A0003585195-1.pdf?src-supplier=IHS+Markit, ComponentLink1URL=https://datasheet.ciiva.com:443/pdfs/VipMasterIC/IC/ONSM/ONSM-S-A0003392874/ONSM-S-A0003585195-1.pdf?src-supplier=IHS+Markit, Diode Element Material=SILICON, Diode Type=RECTIFIER, JESD-30 Code=R-PDSO-F2, Manufacturer Part Number=1N4148WS, Moisture Sensitivity Level=1, Number of Elements=1, Pins=2, Pricing="1=0.11, 10=0.066, 50=0.066, 100=0.062, 1000=0.04, 10000=0.019 (USD)", Qualification Status="Not Qualified", Reach SVHC Compliant=Yes, Reverse Recovery Time-Max=0.004us, RoHS=Yes, RoHS Compliant=Yes, Stock=1099354, Supplier=Mouser, Surface Mount=Yes, Terminal Form=Flat, Terminal Position=DUAL
ENC1: library part PEC11L-4120F-S0020, "Rotary Position Encoder", Manufacturer=Bourns, Supplier Part Number=652-PEC11L4120FS0020, Category=Encoders, ComponentLink1Description=https://datasheet.ciiva.com:443/pdfs/VipMasterIC/IC/BOUR/BOUR-S-A0009552335/BOUR-S-A0009552335-1.pdf?src-supplier=IHS+Markit, ComponentLink1URL=https://datasheet.ciiva.com:443/pdfs/VipMasterIC/IC/BOUR/BOUR-S-A0009552335/BOUR-S-A0009552335-1.pdf?src-supplier=IHS+Markit, ComponentLink2Description=https://datasheet.ciiva.com/29891/pec11l-29891433.pdf?src-supplier=Avnet, ComponentLink2URL=https://datasheet.ciiva.com/29891/pec11l-29891433.pdf?src-supplier=Avnet, ComponentLink3Description=https://datasheet.ciiva.com/24006/pec11l-74340-24006965.pdf?src-supplier=Mouser, ComponentLink3URL=https://datasheet.ciiva.com/24006/pec11l-74340-24006965.pdf?src-supplier=Mouser, ComponentLink4Description=https://datasheet.ciiva.com/45927/1272pec11l-45927899.pdf?src-supplier=Onlinecomponents.com, ComponentLink4URL=https://datasheet.ciiva.com/45927/1272pec11l-45927899.pdf?src-supplier=Onlinecomponents.com, Manufacturer Part Number=PEC11L-4120F-S0020, Optoelectronic Device Type="ROTARY POSITION ENCODER", Pricing="1=2.32, 10=1.81, 50=1.81, 100=1.72, 1000=1.49, 10000=1.3 (USD)", Reach SVHC Compliant=Yes, RoHS=Yes, RoHS Compliant=Yes, Stock=1506, Supplier=Mouser
J1 J2: library part SJ2-35894B-SMT-TR, "3.5 mm, Stereo, Right Angle, Surface Mount (SMT), Audio Jack Connector", Manufacturer="Same Sky", Supplier Part Number=490-SJ2-35894BSMT-TR, ComponentLink1Description=https://www.cuidevices.com/product/resource/digikeypdf/sj2-3589x-smt.pdf?src-supplier=Digikey, ComponentLink1URL=https://www.cuidevices.com/product/resource/digikeypdf/sj2-3589x-smt.pdf?src-supplier=Digikey, Manufacturer Part Number=SJ2-35894B-SMT-TR, Pricing="1=1.3, 10=0.92, 50=0.92, 100=0.798, 1000=0.658, 10000=0.631 (USD)", RoHS=No, Stock=8459, Supplier=Mouser
JP1 JP2 JP3 JP4 JP5 JP6 JP7 JP8 JP9 JP10 JP11 JP12 JP13 JP14: library part SolderBridge
LP1: library part LightPipe
R1 R11 R13: library part CRCW06031K00FKEI, "Fixed Resistor, Metal Glaze/thick Film, 0.1W, 1000ohm, 75V, 1% +/-Tol, 100ppm/Cel, Surface Mount, 0603", Case/Package=0603, Manufacturer=Vishay, Max Operating Temperature=155°C, Min Operating Temperature=-55°C, Package Height=0.45mm, Package Length=1.55mm, Package Shape=Rectangular, Package Width=0.85mm, Power=100mW, Rated Temperature=70°C, Resistor Type="FIXED RESISTOR", Supplier Part Number=71-CRCW06031K00FKEI, Temperature Coefficient (ppm/Cel)=100, Tolerance=1%, Working Voltage=75V, Category="Chip SMD Resistors", ComponentLink1Description=https://datasheet.ciiva.com:443/pdfs/VipMasterIC/IC/VISH/VISH-S-A0007266705/VISH-S-A0007266705-1.pdf?src-supplier=IHS+Markit, ComponentLink1URL=https://datasheet.ciiva.com:443/pdfs/VipMasterIC/IC/VISH/VISH-S-A0007266705/VISH-S-A0007266705-1.pdf?src-supplier=IHS+Markit, Construction=Chip, JESD-609 Code=e3, Manufacturer Part Number=CRCW06031K00FKEI, Mounting Technology="Surface Mount", Packaging="Tape and Reel", Pins=2, Pricing="1=0.12, 10=0.029, 50=0.029, 100=0.016, 1000=0.016, 10000=0.013 (USD)", Reach SVHC Compliant=Yes, Reference Standard=AEC-Q200, RoHS=Yes, RoHS Compliant=Yes, Stock=93678, Supplier=Mouser, Technology="METAL GLAZE/THICK FILM", Terminal Finish=Nickel, Termination=Wraparound
R2: library part CRCW06032K20FKEA, "Fixed Resistor, Metal Glaze/thick Film, 0.1W, 2200ohm, 75V, 1% +/-Tol, 100ppm/Cel, Surface Mount, 0603", Case/Package=0603, Manufacturer=Vishay, Max Operating Temperature=155°C, Min Operating Temperature=-55°C, Package Height=0.45mm, Package Length=1.55mm, Package Shape=Rectangular, Package Width=0.85mm, Power=100mW, Rated Temperature=70°C, Resistor Type="FIXED RESISTOR", Supplier Part Number=71-CRCW0603-2.2K-E3, Temperature Coefficient (ppm/Cel)=100, Tolerance=1%, Working Voltage=75V, Category="Chip SMD Resistors", ComponentLink1Description=https://datasheet.ciiva.com:443/pdfs/VipMasterIC/IC/VISH/VISH-S-A0007266705/VISH-S-A0007266705-1.pdf?src-supplier=IHS+Markit, ComponentLink1URL=https://datasheet.ciiva.com:443/pdfs/VipMasterIC/IC/VISH/VISH-S-A0007266705/VISH-S-A0007266705-1.pdf?src-supplier=IHS+Markit, Construction=Chip, JESD-609 Code=e3, Manufacturer Part Number=CRCW06032K20FKEA, Mounting Technology="Surface Mount", Packaging="Tape and Reel", Pins=2, Pricing="1=0.1, 10=0.028, 50=0.028, 100=0.015, 1000=0.008, 10000=0.004 (USD)", Reach SVHC Compliant=Yes, Reference Standard=AEC-Q200, RoHS=Yes, RoHS Compliant=Yes, Stock=270161, Supplier=Mouser, Technology="METAL GLAZE/THICK FILM", Terminal Finish=Nickel, Termination=Wraparound
R3 R4 R6 R7: library part CRCW0603150RFKEA, "Fixed Resistor, Metal Glaze/thick Film, 0.1W, 150ohm, 75V, 1% +/-Tol, 100ppm/Cel, Surface Mount, 0603", Case/Package=0603, Manufacturer=Vishay, Max Operating Temperature=155°C, Min Operating Temperature=-55°C, Package Height=0.45mm, Package Length=1.55mm, Package Shape=Rectangular, Package Width=0.85mm, Power=100mW, Rated Temperature=70°C, Resistor Type="FIXED RESISTOR", Supplier Part Number=71-CRCW0603-150-E3, Temperature Coefficient (ppm/Cel)=100, Tolerance=1%, Working Voltage=75V, Category="Chip SMD Resistors", ComponentLink1Description=https://datasheet.ciiva.com:443/pdfs/VipMasterIC/IC/VISH/VISH-S-A0007266705/VISH-S-A0007266705-1.pdf?src-supplier=IHS+Markit, ComponentLink1URL=https://datasheet.ciiva.com:443/pdfs/VipMasterIC/IC/VISH/VISH-S-A0007266705/VISH-S-A0007266705-1.pdf?src-supplier=IHS+Markit, ComponentLink2Description=https://datasheet.ciiva.com/11808/0900766b80d98afc-11808649.pdf?src-supplier=Rs, ComponentLink2URL=https://datasheet.ciiva.com/11808/0900766b80d98afc-11808649.pdf?src-supplier=Rs, ComponentLink3Description=https://datasheet.ciiva.com/26316/fld-crcw-e3-data-en-26316570.pdf?src-supplier=Distrelec, ComponentLink3URL=https://datasheet.ciiva.com/26316/fld-crcw-e3-data-en-26316570.pdf?src-supplier=Distrelec, ComponentLink4Description=https://datasheet.ciiva.com/2465/dcrcwe3-2465574.pdf?src-supplier=Digikey, ComponentLink4URL=https://datasheet.ciiva.com/2465/dcrcwe3-2465574.pdf?src-supplier=Digikey, ComponentLink5Description=https://datasheet.ciiva.com/2465/dcrcwe3-2465575.pdf?src-supplier=Digikey, ComponentLink5URL=https://datasheet.ciiva.com/2465/dcrcwe3-2465575.pdf?src-supplier=Digikey, ComponentLink6Description=https://datasheet.ciiva.com/2465/dcrcwe3-2465573.pdf?src-supplier=Digikey, ComponentLink6URL=https://datasheet.ciiva.com/2465/dcrcwe3-2465573.pdf?src-supplier=Digikey, ComponentLink7Description=https://datasheet.ciiva.com/7777/1697337-7777547.pdf?src-supplier=Element14, ComponentLink7URL=https://datasheet.ciiva.com/7777/1697337-7777547.pdf?src-supplier=Element14, ComponentLink8Description=https://datasheet.ciiva.com/16755/70201119-16755595.pdf?src-supplier=Allied+Electronics, ComponentLink8URL=https://datasheet.ciiva.com/16755/70201119-16755595.pdf?src-supplier=Allied+Electronics, ComponentLink9Description=https://datasheet.ciiva.com/16761/70201119-16761055.pdf?src-supplier=Allied+Electronics, ComponentLink9URL=https://datasheet.ciiva.com/16761/70201119-16761055.pdf?src-supplier=Allied+Electronics, ComponentLink10Description=https://datasheet.ciiva.com/5541/dcrcwe3-109170-5541864.pdf?src-supplier=Mouser, ComponentLink10URL=https://datasheet.ciiva.com/5541/dcrcwe3-109170-5541864.pdf?src-supplier=Mouser, Construction=Chip, JESD-609 Code=e3, Manufacturer Part Number=CRCW0603150RFKEA, Mounting Technology="Surface Mount", Packaging="Tape and Reel", Pins=2, Pricing="1=0.1, 10=0.02, 50=0.02, 100=0.014, 1000=0.008, 10000=0.004 (USD)", Reach SVHC Compliant=Yes, Reference Standard=AEC-Q200, RoHS=Yes, RoHS Compliant=Yes, Stock=275413, Supplier=Mouser, Technology="METAL GLAZE/THICK FILM", Terminal Finish=Nickel, Termination=Wraparound
R5: library part CRCW0603470RFKEC, "Fixed Resistor, Metal Glaze/thick Film, 0.1W, 470ohm, 75V, 1% +/-Tol, 100ppm/Cel, Surface Mount, 0603", Case/Package=0603, Manufacturer=Vishay, Max Operating Temperature=155°C, Min Operating Temperature=-55°C, Package Height=0.45mm, Package Length=1.55mm, Package Shape=Rectangular, Package Width=0.85mm, Power=100mW, Rated Temperature=70°C, Resistor Type="FIXED RESISTOR", Supplier Part Number=71-CRCW0603470RFKEC, Temperature Coefficient (ppm/Cel)=100, Tolerance=1%, Working Voltage=75V, Category="Chip SMD Resistors", ComponentLink1Description=https://datasheet.ciiva.com:443/pdfs/VipMasterIC/IC/VISH/VISH-S-A0007266705/VISH-S-A0007266705-1.pdf?src-supplier=IHS+Markit, ComponentLink1URL=https://datasheet.ciiva.com:443/pdfs/VipMasterIC/IC/VISH/VISH-S-A0007266705/VISH-S-A0007266705-1.pdf?src-supplier=IHS+Markit, ComponentLink2Description=http://www.vishay.com/docs/20035/dcrcwe3.pdf?src-supplier=Digikey, ComponentLink2URL=http://www.vishay.com/docs/20035/dcrcwe3.pdf?src-supplier=Digikey, ComponentLink3Description=https://datasheet.octopart.com/CRCW0603470RFKEC-Vishay-datasheet-62316122.pdf?src-supplier=Future+Electronics, ComponentLink3URL=https://datasheet.octopart.com/CRCW0603470RFKEC-Vishay-datasheet-62316122.pdf?src-supplier=Future+Electronics, Construction=Chip, JESD-609 Code=e3, Manufacturer Part Number=CRCW0603470RFKEC, Mounting Technology="Surface Mount", Packaging="Tape and Reel", Pins=2, Pricing="1=0.1, 10=0.017, 50=0.017, 100=0.017, 1000=0.017, 10000=0.017 (USD)", Reach SVHC Compliant=Yes, Reference Standard=AEC-Q200, RoHS=Yes, RoHS Compliant=Yes, Stock=49691, Supplier=Mouser, Technology="METAL GLAZE/THICK FILM", Terminal Finish=Nickel, Termination=Wraparound
R8 R9 R10: library part CRCW060347K0FKEA, "Fixed Resistor, Metal Glaze/thick Film, 0.1W, 47000ohm, 75V, 1% +/-Tol, 100ppm/Cel, Surface Mount, 0603", Case/Package=0603, Manufacturer=Vishay, Max Operating Temperature=155°C, Min Operating Temperature=-55°C, Package Height=0.45mm, Package Length=1.55mm, Package Shape=Rectangular, Package Width=0.85mm, Power=100mW, Rated Temperature=70°C, Resistor Type="FIXED RESISTOR", Supplier Part Number=71-CRCW0603-47K-E3, Temperature Coefficient (ppm/Cel)=100, Tolerance=1%, Working Voltage=75V, Category="Chip SMD Resistors", ComponentLink1Description=https://datasheet.ciiva.com:443/pdfs/VipMasterIC/IC/VISH/VISH-S-A0007266705/VISH-S-A0007266705-1.pdf?src-supplier=IHS+Markit, ComponentLink1URL=https://datasheet.ciiva.com:443/pdfs/VipMasterIC/IC/VISH/VISH-S-A0007266705/VISH-S-A0007266705-1.pdf?src-supplier=IHS+Markit, ComponentLink2Description=https://datasheet.ciiva.com/11808/0900766b80d98afc-11808694.pdf?src-supplier=Rs, ComponentLink2URL=https://datasheet.ciiva.com/11808/0900766b80d98afc-11808694.pdf?src-supplier=Rs, Construction=Chip, JESD-609 Code=e3, Manufacturer Part Number=CRCW060347K0FKEA, Mounting Technology="Surface Mount", Packaging="Tape and Reel", Pins=2, Pricing="1=0.1, 10=0.028, 50=0.028, 100=0.015, 1000=0.008, 10000=0.004 (USD)", Reach SVHC Compliant=Yes, Reference Standard=AEC-Q200, RoHS=Yes, RoHS Compliant=Yes, Stock=182851, Supplier=Mouser, Technology="METAL GLAZE/THICK FILM", Terminal Finish=Nickel, Termination=Wraparound
R12: library part CRCW060310K0FKEA, "Fixed Resistor, Metal Glaze/thick Film, 0.1W, 10000ohm, 75V, 1% +/-Tol, 100ppm/Cel, Surface Mount, 0603", Case/Package=0603, Manufacturer=Vishay, Max Operating Temperature=155°C, Min Operating Temperature=-55°C, Package Height=0.45mm, Package Length=1.55mm, Package Shape=Rectangular, Package Width=0.85mm, Power=100mW, Rated Temperature=70°C, Resistor Type="FIXED RESISTOR", Supplier Part Number=71-CRCW0603-10K-E3, Temperature Coefficient (ppm/Cel)=100, Tolerance=1%, Working Voltage=75V, Category="Chip SMD Resistors", ComponentLink1Description=https://datasheet.ciiva.com:443/pdfs/VipMasterIC/IC/VISH/VISH-S-A0007266705/VISH-S-A0007266705-1.pdf?src-supplier=IHS+Markit, ComponentLink1URL=https://datasheet.ciiva.com:443/pdfs/VipMasterIC/IC/VISH/VISH-S-A0007266705/VISH-S-A0007266705-1.pdf?src-supplier=IHS+Markit, ComponentLink2Description=https://datasheet.ciiva.com/11809/0900766b80d98afc-11809037.pdf?src-supplier=Rs, ComponentLink2URL=https://datasheet.ciiva.com/11809/0900766b80d98afc-11809037.pdf?src-supplier=Rs, ComponentLink3Description=https://datasheet.ciiva.com/46385/1697337-46385498.pdf?src-supplier=Element14, ComponentLink3URL=https://datasheet.ciiva.com/46385/1697337-46385498.pdf?src-supplier=Element14, ComponentLink4Description=https://datasheet.ciiva.com/2465/dcrcwe3-2465514.pdf?src-supplier=Digikey, ComponentLink4URL=https://datasheet.ciiva.com/2465/dcrcwe3-2465514.pdf?src-supplier=Digikey, ComponentLink5Description=https://datasheet.ciiva.com/2465/dcrcwe3-2465515.pdf?src-supplier=Digikey, ComponentLink5URL=https://datasheet.ciiva.com/2465/dcrcwe3-2465515.pdf?src-supplier=Digikey, ComponentLink6Description=https://datasheet.ciiva.com/2465/dcrcwe3-2465513.pdf?src-supplier=Digikey, ComponentLink6URL=https://datasheet.ciiva.com/2465/dcrcwe3-2465513.pdf?src-supplier=Digikey, ComponentLink7Description=https://datasheet.ciiva.com/5543/dcrcwe3-109170-5543001.pdf?src-supplier=Mouser, ComponentLink7URL=https://datasheet.ciiva.com/5543/dcrcwe3-109170-5543001.pdf?src-supplier=Mouser, ComponentLink8Description=https://datasheet.ciiva.com/3256/dcrcwe3-3256940.pdf?src-supplier=Avnet, ComponentLink8URL=https://datasheet.ciiva.com/3256/dcrcwe3-3256940.pdf?src-supplier=Avnet, ComponentLink9Description=https://datasheet.ciiva.com/16209/dcrcwe3-16209164.pdf?src-supplier=Future+Electronics, ComponentLink9URL=https://datasheet.ciiva.com/16209/dcrcwe3-16209164.pdf?src-supplier=Future+Electronics, ComponentLink10Description=https://datasheet.ciiva.com/3256/dcrcwe3-3256939.pdf?src-supplier=Avnet, ComponentLink10URL=https://datasheet.ciiva.com/3256/dcrcwe3-3256939.pdf?src-supplier=Avnet, ComponentLink11Description=https://datasheet.ciiva.com/26314/fld-crcw-e3-data-en-26314749.pdf?src-supplier=Distrelec, ComponentLink11URL=https://datasheet.ciiva.com/26314/fld-crcw-e3-data-en-26314749.pdf?src-supplier=Distrelec, ComponentLink12Description=https://datasheet.ciiva.com/16719/70201119-16719704.pdf?src-supplier=Allied+Electronics, ComponentLink12URL=https://datasheet.ciiva.com/16719/70201119-16719704.pdf?src-supplier=Allied+Electronics, ComponentLink13Description=https://datasheet.ciiva.com/16754/70201119-16754710.pdf?src-supplier=Allied+Electronics, ComponentLink13URL=https://datasheet.ciiva.com/16754/70201119-16754710.pdf?src-supplier=Allied+Electronics, Construction=Chip, JESD-609 Code=e3, Manufacturer Part Number=CRCW060310K0FKEA, Mounting Technology="Surface Mount", Packaging="Tape and Reel", Pins=2, Pricing="1=0.1, 10=0.031, 50=0.031, 100=0.015, 1000=0.008, 10000=0.004 (USD)", Reach SVHC Compliant=Yes, Reference Standard=AEC-Q200, RoHS=Yes, RoHS Compliant=Yes, Stock=2181326, Supplier=Mouser, Technology="METAL GLAZE/THICK FILM", Terminal Finish=Nickel, Termination=Wraparound
TP1 TP2 TP3 TP4 TP5 TP6 TP7 TP8 TP9 TP10 TP11 TP12 TP13 TP14 TP15 TP16 TP17: library part TestPoint
U1 U2: library part OPA2323IDR, Manufacturer="Texas Instruments", Supplier Part Number=595-OPA2323IDR, Manufacturer Part Number=OPA2323IDR, Pricing="1=1.63, 10=1.1, 50=0.974, 100=0.778, 1000=0.411, 10000=0.393 (USD)", RoHS=No, Stock=5343, Supplier=Mouser
VR1: library part TS53YL105MR10, "Trimmer, Cermet, 0.04W, 1000000ohm, 200V, 20% +/-Tol, 100ppm/Cel, 1 Turn(s)", Case/Package=2020, Manufacturer="Vishay Sfernice", Max Operating Temperature=125°C, Min Operating Temperature=-55°C, Package Height=2.7mm, Package Length=5mm, Package Shape=Rectangular, Power=250mW, Rated Temperature=70°C, Resistance Law=Linear, Resistor Type=TRIMMER, Supplier Part Number=72-TS53YL-1M, Temperature Coefficient (ppm/Cel)=-100,100, Tolerance=20%, Working Voltage=200V, Actuator Orientation=Vertical, Actuator Type=SCREW, Category="Variable Resistors and Potentiometers", ComponentLink1Description=https://datasheet.ciiva.com:443/pdfs/VipMasterIC/IC/VISH/VISH-S-A0007084328/VISH-S-A0007084328-1.pdf?src-supplier=IHS+Markit, ComponentLink1URL=https://datasheet.ciiva.com:443/pdfs/VipMasterIC/IC/VISH/VISH-S-A0007084328/VISH-S-A0007084328-1.pdf?src-supplier=IHS+Markit, ComponentLink2Description=https://datasheet.ciiva.com/8699/ts53y-8699175.pdf?src-supplier=Avnet, ComponentLink2URL=https://datasheet.ciiva.com/8699/ts53y-8699175.pdf?src-supplier=Avnet, Construction=Trimmer, JESD-609 Code=e3, Manufacturer Part Number=TS53YL105MR10, Mounting Technology="Surface Mount", Number of Turns=1, Package Width=5mm, Packaging="Tape and Reel", Pins=3, Pricing="1=2.72, 10=2.03, 50=2.03, 100=1.8, 1000=1.33, 10000=1.32 (USD)", Reach SVHC Compliant=Yes, RoHS=Yes, RoHS Compliant=Yes, Rotational Angle=220°, Stock=577, Supplier=Mouser, Technology=CERMET, Terminal Finish=Tin, Termination="Gull Wing"
VR2: library part TS53YL204MR10, "Trimmer, Cermet, 0.2W, 200000ohm, 200V, 20% +/-Tol, 100ppm/Cel, 1 Turn(s)", Case/Package=2020, Manufacturer="Vishay Sfernice", Max Operating Temperature=125°C, Min Operating Temperature=-55°C, Package Height=2.7mm, Package Length=5mm, Package Shape=Rectangular, Power=250mW, Rated Temperature=70°C, Resistance Law=Linear, Resistor Type=TRIMMER, Supplier Part Number=72-TS53YL-200K, Temperature Coefficient (ppm/Cel)=-100,100, Tolerance=20%, Working Voltage=200V, Actuator Orientation=Vertical, Actuator Type=SCREW, Category="Variable Resistors and Potentiometers", ComponentLink1Description=https://datasheet.ciiva.com:443/pdfs/VipMasterIC/IC/VISH/VISH-S-A0007084328/VISH-S-A0007084328-1.pdf?src-supplier=IHS+Markit, ComponentLink1URL=https://datasheet.ciiva.com:443/pdfs/VipMasterIC/IC/VISH/VISH-S-A0007084328/VISH-S-A0007084328-1.pdf?src-supplier=IHS+Markit, ComponentLink2Description=https://datasheet.ciiva.com/11831/0900766b80442f56-11831524.pdf?src-supplier=Rs, ComponentLink2URL=https://datasheet.ciiva.com/11831/0900766b80442f56-11831524.pdf?src-supplier=Rs, ComponentLink3Description=https://datasheet.ciiva.com/2157/ts53y-2157357.pdf?src-supplier=Digikey, ComponentLink3URL=https://datasheet.ciiva.com/2157/ts53y-2157357.pdf?src-supplier=Digikey, ComponentLink4Description=https://datasheet.ciiva.com/2157/ts53y-2157358.pdf?src-supplier=Digikey, ComponentLink4URL=https://datasheet.ciiva.com/2157/ts53y-2157358.pdf?src-supplier=Digikey, ComponentLink5Description=https://datasheet.ciiva.com/2157/ts53y-2157359.pdf?src-supplier=Digikey, ComponentLink5URL=https://datasheet.ciiva.com/2157/ts53y-2157359.pdf?src-supplier=Digikey, ComponentLink6Description=https://datasheet.ciiva.com/8697/ts53y-8697353.pdf?src-supplier=Avnet, ComponentLink6URL=https://datasheet.ciiva.com/8697/ts53y-8697353.pdf?src-supplier=Avnet, ComponentLink7Description=https://datasheet.ciiva.com/8021/1696501-8021149.pdf?src-supplier=Element14, ComponentLink7URL=https://datasheet.ciiva.com/8021/1696501-8021149.pdf?src-supplier=Element14, ComponentLink8Description=https://datasheet.ciiva.com/16354/ts53y-16354136.pdf?src-supplier=Future+Electronics, ComponentLink8URL=https://datasheet.ciiva.com/16354/ts53y-16354136.pdf?src-supplier=Future+Electronics, ComponentLink9Description=https://datasheet.ciiva.com/16717/70218802-16717320.pdf?src-supplier=Allied+Electronics, ComponentLink9URL=https://datasheet.ciiva.com/16717/70218802-16717320.pdf?src-supplier=Allied+Electronics, Construction=Trimmer, JESD-609 Code=e3, Manufacturer Part Number=TS53YL204MR10, Mounting Technology="Surface Mount", Number of Turns=1, Package Width=5mm, Packaging="Tape and Reel", Pins=3, Pricing="1=2.72, 10=2.29, 50=2.19, 100=1.9, 1000=1.56, 10000=1.34 (USD)", RoHS=Yes, RoHS Compliant=Yes, Rotational Angle=220°, Stock=1294, Supplier=Mouser, Technology=CERMET, Terminal Finish=Tin, Termination="Gull Wing"
VR3: library part TS53YL102MR10, "Trimmer, Cermet, 0.25W, 1000ohm, 15.8V, 20% +/-Tol, 100ppm/Cel, 1 Turn(s)", Case/Package=2020, Manufacturer=Vishay, Max Operating Temperature=125°C, Min Operating Temperature=-55°C, Package Height=2.7mm, Package Length=5mm, Package Shape=Rectangular, Power=250mW, Rated Temperature=70°C, Resistance Law=Linear, Resistor Type=TRIMMER, Supplier Part Number=72-TS53YL-1K, Temperature Coefficient (ppm/Cel)=-100,100, Tolerance=20%, Working Voltage=15.8V, Actuator Orientation=Vertical, Actuator Type=SCREW, Category="Variable Resistors and Potentiometers", ComponentLink1Description=https://datasheet.ciiva.com:443/pdfs/VipMasterIC/IC/VISH/VISH-S-A0007084328/VISH-S-A0007084328-1.pdf?src-supplier=IHS+Markit, ComponentLink1URL=https://datasheet.ciiva.com:443/pdfs/VipMasterIC/IC/VISH/VISH-S-A0007084328/VISH-S-A0007084328-1.pdf?src-supplier=IHS+Markit, ComponentLink2Description=https://datasheet.ciiva.com/11831/0900766b80442f56-11831972.pdf?src-supplier=Rs, ComponentLink2URL=https://datasheet.ciiva.com/11831/0900766b80442f56-11831972.pdf?src-supplier=Rs, ComponentLink3Description=https://datasheet.ciiva.com/2158/ts53y-2158713.pdf?src-supplier=Digikey, ComponentLink3URL=https://datasheet.ciiva.com/2158/ts53y-2158713.pdf?src-supplier=Digikey, ComponentLink4Description=https://datasheet.ciiva.com/2158/ts53y-2158714.pdf?src-supplier=Digikey, ComponentLink4URL=https://datasheet.ciiva.com/2158/ts53y-2158714.pdf?src-supplier=Digikey, ComponentLink5Description=https://datasheet.ciiva.com/2158/ts53y-2158715.pdf?src-supplier=Digikey, ComponentLink5URL=https://datasheet.ciiva.com/2158/ts53y-2158715.pdf?src-supplier=Digikey, ComponentLink6Description=https://datasheet.ciiva.com/16335/ts53y-16335610.pdf?src-supplier=Future+Electronics, ComponentLink6URL=https://datasheet.ciiva.com/16335/ts53y-16335610.pdf?src-supplier=Future+Electronics, ComponentLink7Description=https://datasheet.ciiva.com/16716/70218802-16716971.pdf?src-supplier=Allied+Electronics, ComponentLink7URL=https://datasheet.ciiva.com/16716/70218802-16716971.pdf?src-supplier=Allied+Electronics, ComponentLink8Description=https://datasheet.ciiva.com/22715/1696501-22715039.pdf?src-supplier=Element14, ComponentLink8URL=https://datasheet.ciiva.com/22715/1696501-22715039.pdf?src-supplier=Element14, Construction=Trimmer, JESD-609 Code=e3, Manufacturer Part Number=TS53YL102MR10, Mounting Technology="Surface Mount", Number of Turns=1, Package Width=5mm, Packaging="Tape and Reel", Pins=3, Pricing="1=2.72, 10=2.29, 50=2.29, 100=1.93, 1000=1.56, 10000=1.42 (USD)", Reach SVHC Compliant=Yes, RoHS=Yes, RoHS Compliant=Yes, Rotational Angle=220°, Stock=1337, Supplier=Mouser, Technology=CERMET, Terminal Finish=Tin, Termination="Gull Wing"

## Via types
v1: diameter 0.6, hole 0.2, Top to Bottom, tented both sides, 29 vias

## Nets (pads, with @x,y where several pads share a name; then routed paths per layer and width w, separated by ;. In a path a pad name is that pad's centre, name@x,y a point inside that pad or via, vN(x,y) a via of type N, cw(c..) or ccw(c..) an arc to the next point about the centre after c; other vN are vias at no path point)
ADC_IN: J3.6 JP4.2 | length 3.4
  Top w0.25: JP4.2 47.604,33 48.028,33.424 J3.6
BUTTON: J6.4 JP13.2 | length 60.6
  Top w0.25: JP13.2 30.68,36.25 v1(30.73,36.3)
  Bottom w0.25: J6.4 25.9,6.5 35.8,16.4 35.8,24.966 31.5,29.266 31.5,35.53 v1(30.73,36.3)
DAC_OUT: J6.3 JP9.1 TP7.1 | length 4.2
  Top w0.25: J6.3 1.44,9.02 3.98,9.02 TP7.1 JP9.1
ENC_A: J6.1 JP12.1 | length 20.7
  Top w0.25: JP12.1 17.775,21.875 v1(17.8,21.9)
  Bottom w0.25: J6.1 3.62,14.12 11.4,21.9 v1(17.8,21.9)
ENC_B: J6.2 JP14.1 | length 37.4
  Top w0.25: JP14.1 33.275,21.975 v1(33.3,22)
  Bottom w0.25: J6.2 6.98,11.58 15.5,20.1 31.4,20.1 v1(33.3,22)
GND: C2.1 C5.1 C6.1 C7.1 C10.1 C11.1 C12.1 C13.1 C14.1 D1.2 D2.1 ENC1.2 ENC1.5 J1.4 J2.4 J3.4 J4.6 J4.7 TP10.1 U1.4 U2.4 VR2.1 VR3.1 | length 22.5
  Top w0.25: v1(8.2,11.2) 9.55,11.2 C11.1 ; D2.1 v1(10.6,26) ; D1.2 9.9,27.775 10.575,27.775 v1(10.6,27.8) ; VR3.1 v1(12.6,21.1) ; v1(17,16.9) 18.271,16.9 C13.1 ; v1(26.5,33.5) C12.1 ; C14.1 32.779,16.9 v1(34,16.9) ; v1(37.5,34.1) C5.1 ; VR2.1 v1(42.6,22.7) ; C6.1 v1(46.3,35.1)
  Top w0.5: v1(4.445,13.345) U2.4 ; v1(13.236,19.76) 13.243,19.753 13.243,18.757 C10.1 ; C2.1 v1(16.2,7.6) ; J1.4 v1(23.6,2) ; v1(27.4,49.1) 28.85,49.1 J2.4 ; U1.4 42.905,29.845 C7.1 v1(44.75,29.25)
INPUT_PWR: C5.2 JP2.1 U1.8 | length 4.2
  Top w0.5: C5.2 37.5,38.375 JP2.1 ; 37.725,38.4 38.7,38.4 39.1,38 39.1,36.955 U1.8
LEFT: J1.2 J2.2 | length 41.7
  Top w0.5: J1.2 22,9 v1(23.8,9) ; v1(27.3,41.8) 29,41.8 J2.2
  L5 w0.5: v1(23.8,9) 19.4,13.4 19.4,20.8 25.6,27 25.6,40.1 v1(27.3,41.8)
MIC_PWR: JP1.1 R1.2 | length 1.3
  Top w0.5: R1.2 JP1.1
NetC1_1: C1.1 C3.2 U1.2 VR1.3 | length 14
  Top w0.25: VR1.3 39.4,24.3 40,24.9 C1.1 40.365,29.615 U1.2
  Top w0.5: VR1.3 39.4,20 40.4,19 C3.2
NetC1_2: C1.2 JP5.1 TP3.1 U1.1 VR1.1 VR1.2 | length 14.2
  Top w0.25: JP5.1 TP3.1 C1.2 ; VR1.1 37.1,24.3 38.25,25.45 VR1.2 38.5,27.25 C1.2 ; U1.1 39.095,29.845 C1.2
NetC2_2: C2.2 R1.1 R2.2 | length 3.8
  Top w0.5: C2.2 R1.1 R2.2
NetC3_1: C3.1 JP3.2 | length 8.4
  Top w0.25: JP3.2 36.125,2.925 36.15,2.9
  Top w0.5: 36.15,2.9 40.6,2.9 C3.1
NetC4_1: C4.1 R3.2 R4.1 | length 5.8
  Top w0.25: R3.2@38.75,41 42.15,41 C4.1 44.4,40.9 R4.1
NetC4_2: C4.2 JP4.1 TP2.1 U1.6 U1.7 | length 13.3
  Top w0.25: U1.7 40.365,38.885 TP2.1 C4.2@42.15,39 ; C4.2 C4.2@42.15,39 ; JP4.1 43.4,33 41.635,34.765 U1.6 41.635,38.035 41.896,38.296 41.896,38.746 C4.2@42.15,39
NetC6_2: C6.2 R4.2 U1.5 | length 5.4
  Top w0.25: U1.5 42.999,37.044 42.999,37.874 43.425,38.3 44.3,38.3 44.5,38.5 ; R4.2 44.5,38.5 ; C6.2 44.8,38.2 44.5,38.5
NetC7_2: C7.2 U1.3 VR2.2 | length 5.6
  Top w0.25: U1.3 41.635,29.615 C7.2 42.875,28.375 42.875,27.525 43.4,27 VR2.2
NetC8_1: C8.1 R5.2 | length 2.7
  Top w0.25: R5.2 9.5,31.5 C8.1
NetC8_2: C8.2 J2.1 | length 12.3
  Top w0.25: C8.2 10.5,49 J2.1
NetC9_1: C9.1 R6.2 R7.1 | length 4.1
  Top w0.25: R6.2 R7.1 C9.1
NetC9_2: C9.2 JP8.1 TP5.1 U2.6 U2.7 | length 9.1
  Top w0.25: U2.6 12.6,14.615 TP5.1@13.235,15.25 ; U2.7 12.6,15.885 TP5.1@13.235,15.25 ; JP8.1 C9.2 15.15,15.25 TP5.1 TP5.1@13.235,15.25
NetC11_2: C11.2 R7.2 U2.5 | length 6.2
  Top w0.25: C11.2 R7.2 13.75,12.35 12.755,13.345 U2.5
NetC12_2: C12.2 JP13.1 R12.2 TP15.1 | length 5.3
  Top w0.25: R12.2 C12.2 TP15.1 JP13.1
NetC13_2: C13.2 JP12.2 R11.1 TP12.1 | length 6.1
  Top w0.25: JP12.2 17.8,19.954 TP12.1 17.982,18.318 18.361,18.318 C13.2 R11.1
NetC14_2: C14.2 JP14.2 R13.1 TP16.1 | length 6.2
  Top w0.25: R13.1 C14.2 31.333,16.962 31.333,17.533 32.361,18.561 32.961,18.561 TP16.1 ; JP14.2 33.3,19.954 TP16.1@33.3,18.7
NetD1_1: D1.1 JP10.1 | length 1.2
  Top w0.25: JP10.1 7.59,27.785 D1.1
NetD2_2: D2.2 JP11.1 | length 1.2
  Top w0.25: JP11.1 7.59,26.035 D2.2
NetENC1_1: ENC1.1 R10.1 R12.1 TP14.1 | length 5.8
  Top w0.25: R10.1 TP14.1 ; ENC1.1 TP14.1 ; R12.1 TP14.1
NetENC1_3: ENC1.3 R8.1 R11.2 TP13.1 | length 5.7
  Top w0.25: ENC1.3 22.9,18 21.7,16.8 TP13.1 21.6,16.543 21.275,16.218 R11.2 R8.1
NetENC1_4: ENC1.4 R9.1 R13.2 TP17.1 | length 5.7
  Top w0.25: ENC1.4 28.1,18 29.3,16.8 TP17.1 29.4,16.543 29.775,16.168 R13.2 R9.1
NetJ1_1: J1.1 JP3.1 R2.1 TP1.1 | length 14.9
  Top w0.25: J1.1 30.343,2 30.743,2.4 31.257,2.4 31.582,2.075 JP3.1
  Top w0.5: R2.1 24.6,6.35 J1.1
NetJP5_2: JP5.2 R3.1 TP4.1 | length 14.5
  Top w0.25: JP5.2 36.5,32.5 35.4,33.6 34.3,33.6 33,34.9 33,38.6 35.4,41 TP4.1 R3.1@37.25,41
NetJP7_1: JP7.1 JP10.2 JP11.2 TP6.1 U2.1 U2.2 | length 17.4
  Top w0.25: JP7.1 JP10.2 JP11.2 4.25,24.735 TP6.1 ; U2.2 5.89,16.045 4.955,16.045 TP6.1 ; U2.1 4.9,17.155 4.495,16.75 TP6.1
NetJP7_2: JP7.2 R5.1 | length 1.6
  Top w0.25: JP7.2 7.965,29.535 R5.1
NetJP8_2: JP8.2 VR3.3 | length 6
  Top w0.25: VR3.3 15.25,19.65 JP8.2
NetJP9_2: JP9.2 R6.1 TP8.1 | length 7.4
  Top w0.25: JP9.2 TP8.1 13.5,9 R6.1
NetTP9_1: TP9.1 U2.3 VR3.2 | length 14.5
  Top w0.25: TP9.1 VR3.2 ; VR3.2@6,21.9 8.9,19 8.9,15.2 8.315,14.615 U2.3
OUTPUT_PWR: C10.2 JP6.1 U2.8 | length 3.9
  Top w0.5: U2.8 11.497,17.203 13.202,17.203 C10.2 11.925,18.575 JP6.1
RIGHT: J1.3 J2.3 | length 54.2
  Top w0.5: J2.3 23.55,45.65 v1(23.6,45.6) ; v1(27.2,5.3) 29.05,5.3 J1.3
  L5 w0.5: v1(23.6,45.6) 27.1,45.6 31.5,41.2 31.5,29.2 27.707,25.407 27.707,23.293 31.5,19.5 31.5,11.5 27.2,7.2 v1(27.2,5.3)
VCC: J3.3 J4.4 JP1.2 JP2.2 JP6.2 R8.2 R9.2 R10.2 TP11.1 VR2.3 | length 7.2
  Top w0.25: v1(18.2,34.3) 19.45,34.3 R10.2 ; R8.2 24.529,14.9 v1(25.5,14.9) 26.521,14.9 R9.2 ; VR2.3 v1(44.9,22.7)
  Top w0.5: v1(10.15,18.75) JP6.2 ; JP1.2 v1(18.1,9.4) ; v1(35.8,38.4) JP2.2
pads on no net: ENC1.6 ENC1.7 J1.10 J1.11 J1.12 J2.10 J2.11 J2.12 J3.1 J3.2 J3.5 J3.7 J3.8 J3.9 J3.10 J4.1 J4.2 J4.3 J4.5 J4.8 J5.1 J5.2 J5.3 J5.4 J5.5 J5.6 J5.7 J5.8 J6.5 J6.6 LP1.1

## Polygon pours and split planes (outlines as drawn)
no net on Top Solder (solid): 50,48.5 50,50 49.5,50 49.5,49.6 49.4,49.5 49.1,49.5 49,49.6 49,50 48.5,50 48.5,49.5 48.9,49.5 49,49.4 49,49.1 48.9,49 48.5,49 48.5,48.5
VCC on L5 "VCC_L05_P009" (solid, pour order 9): 0,0 51,0 51,51 0,51
GND on Top "GND_L01_P010" (solid, pour order 10): 0,0 51,0 51,43 33,43 32,44 32,50 31,51 0,51
no net on Top "NONET_L01_P008" (solid, pour order 8): 50.1,48.4 50.1,50.1 49.4,50.1 49.4,49.6 49.1,49.6 49.1,50.1 48.4,50.1 48.4,49.4 48.9,49.4 48.9,49.1 48.4,49.1 48.4,48.4
GND on L4 "GND_L04_P000" (solid, pour order 0): 0,0 51,0 51,51 0,51
GND on L2 "GND_L02_P001" (solid, pour order 1): 0,0 51,0 51,51 0,51
GND on Bottom "GND_L06_P005" (solid, pour order 5): 20.1,40.6 0.9,40.6 0,39.7 0,0 51,0 51,51 22.5,51 21.5,50 21.5,42
VCC on L3 "VCC_L03_P006" (solid, pour order 6): 0,0 51,0 51,51 0,51

## Other copper
Top:
  text "Pale Sieve" at 47.5,49.9 h1.5 r180
  text "Reshetnikov" at 47.516,47.756 h1 r180
  text "Bogdan" at 47.502,46.362 h1 r180
  text "Revision 01" at 47.506,44.996 h1 r180
Bottom: